# Altium PCB superhet1.PcbDoc (part 1 of 5)
Units mm, origin at the board's own origin, x right, y up, seen from the top; angles counter-clockwise.
Board outline 77 x 100 mm, 4 copper layers (Top Layer, Internal Plane 1, Signal Layer 1, Bottom Layer), stack 0.778 mm thick; 440 components, 348 nets, 1672 pads, 2403 vias.
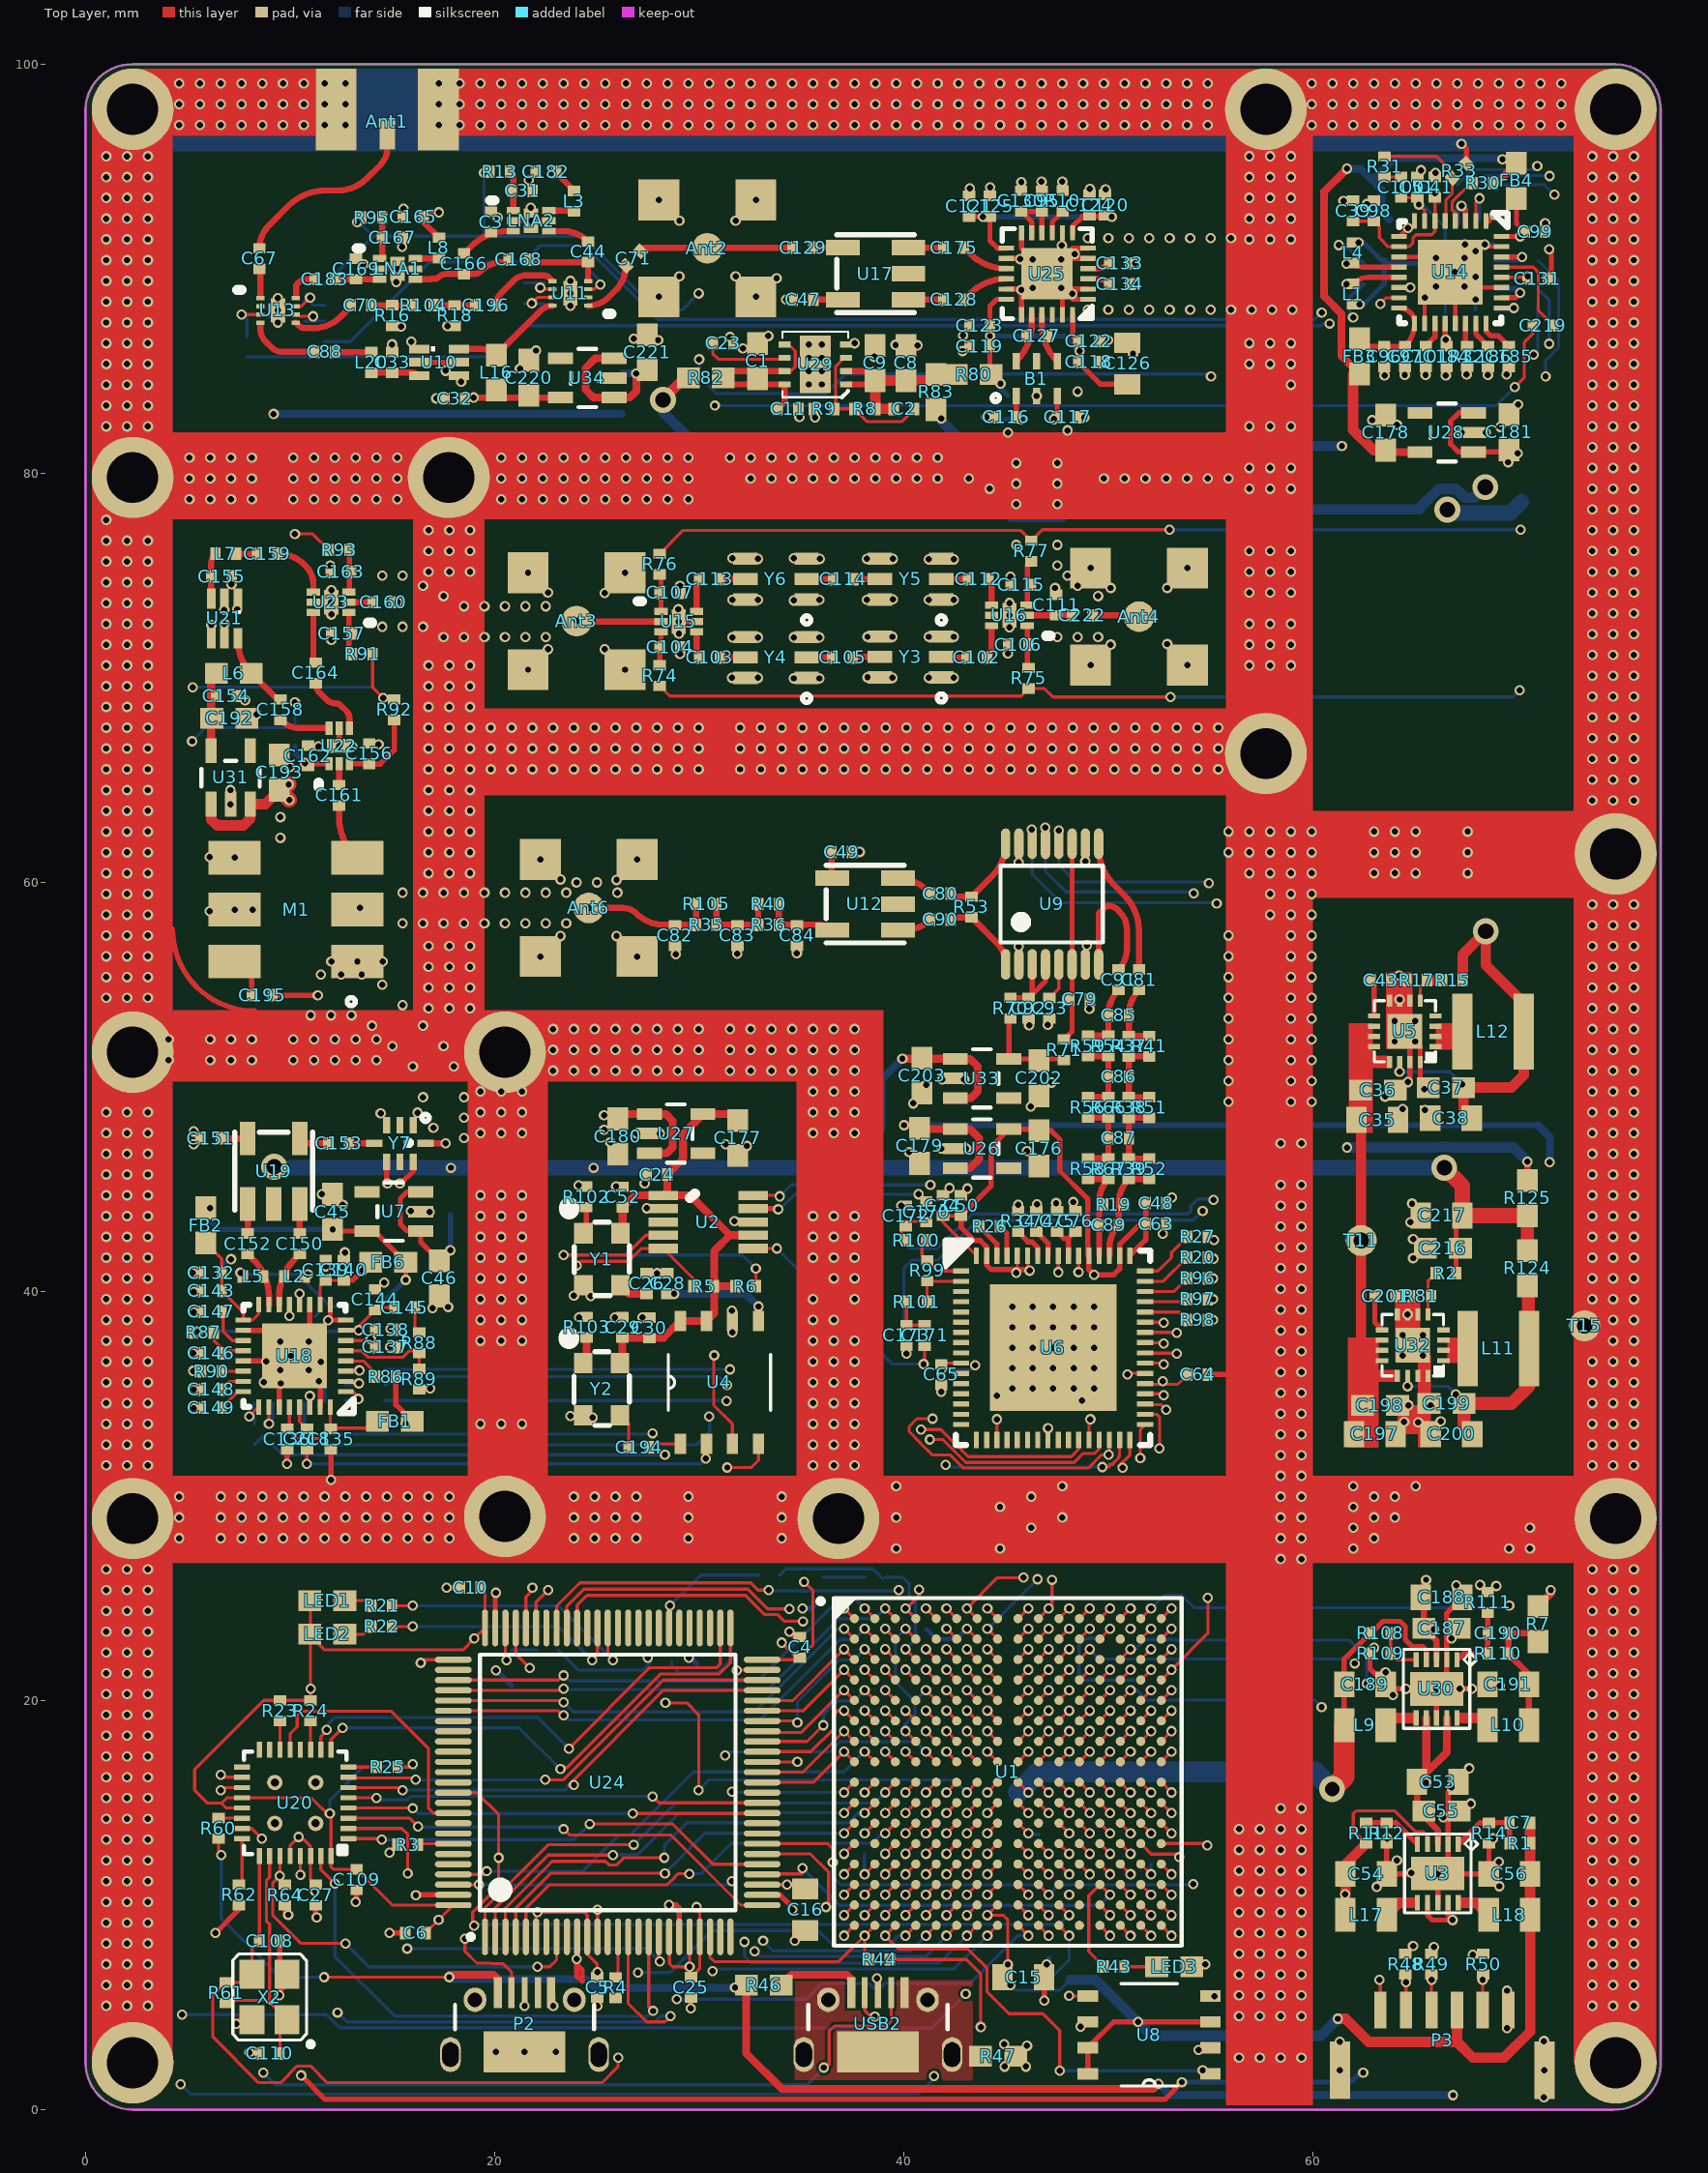
[diagram p0: Top Layer view]
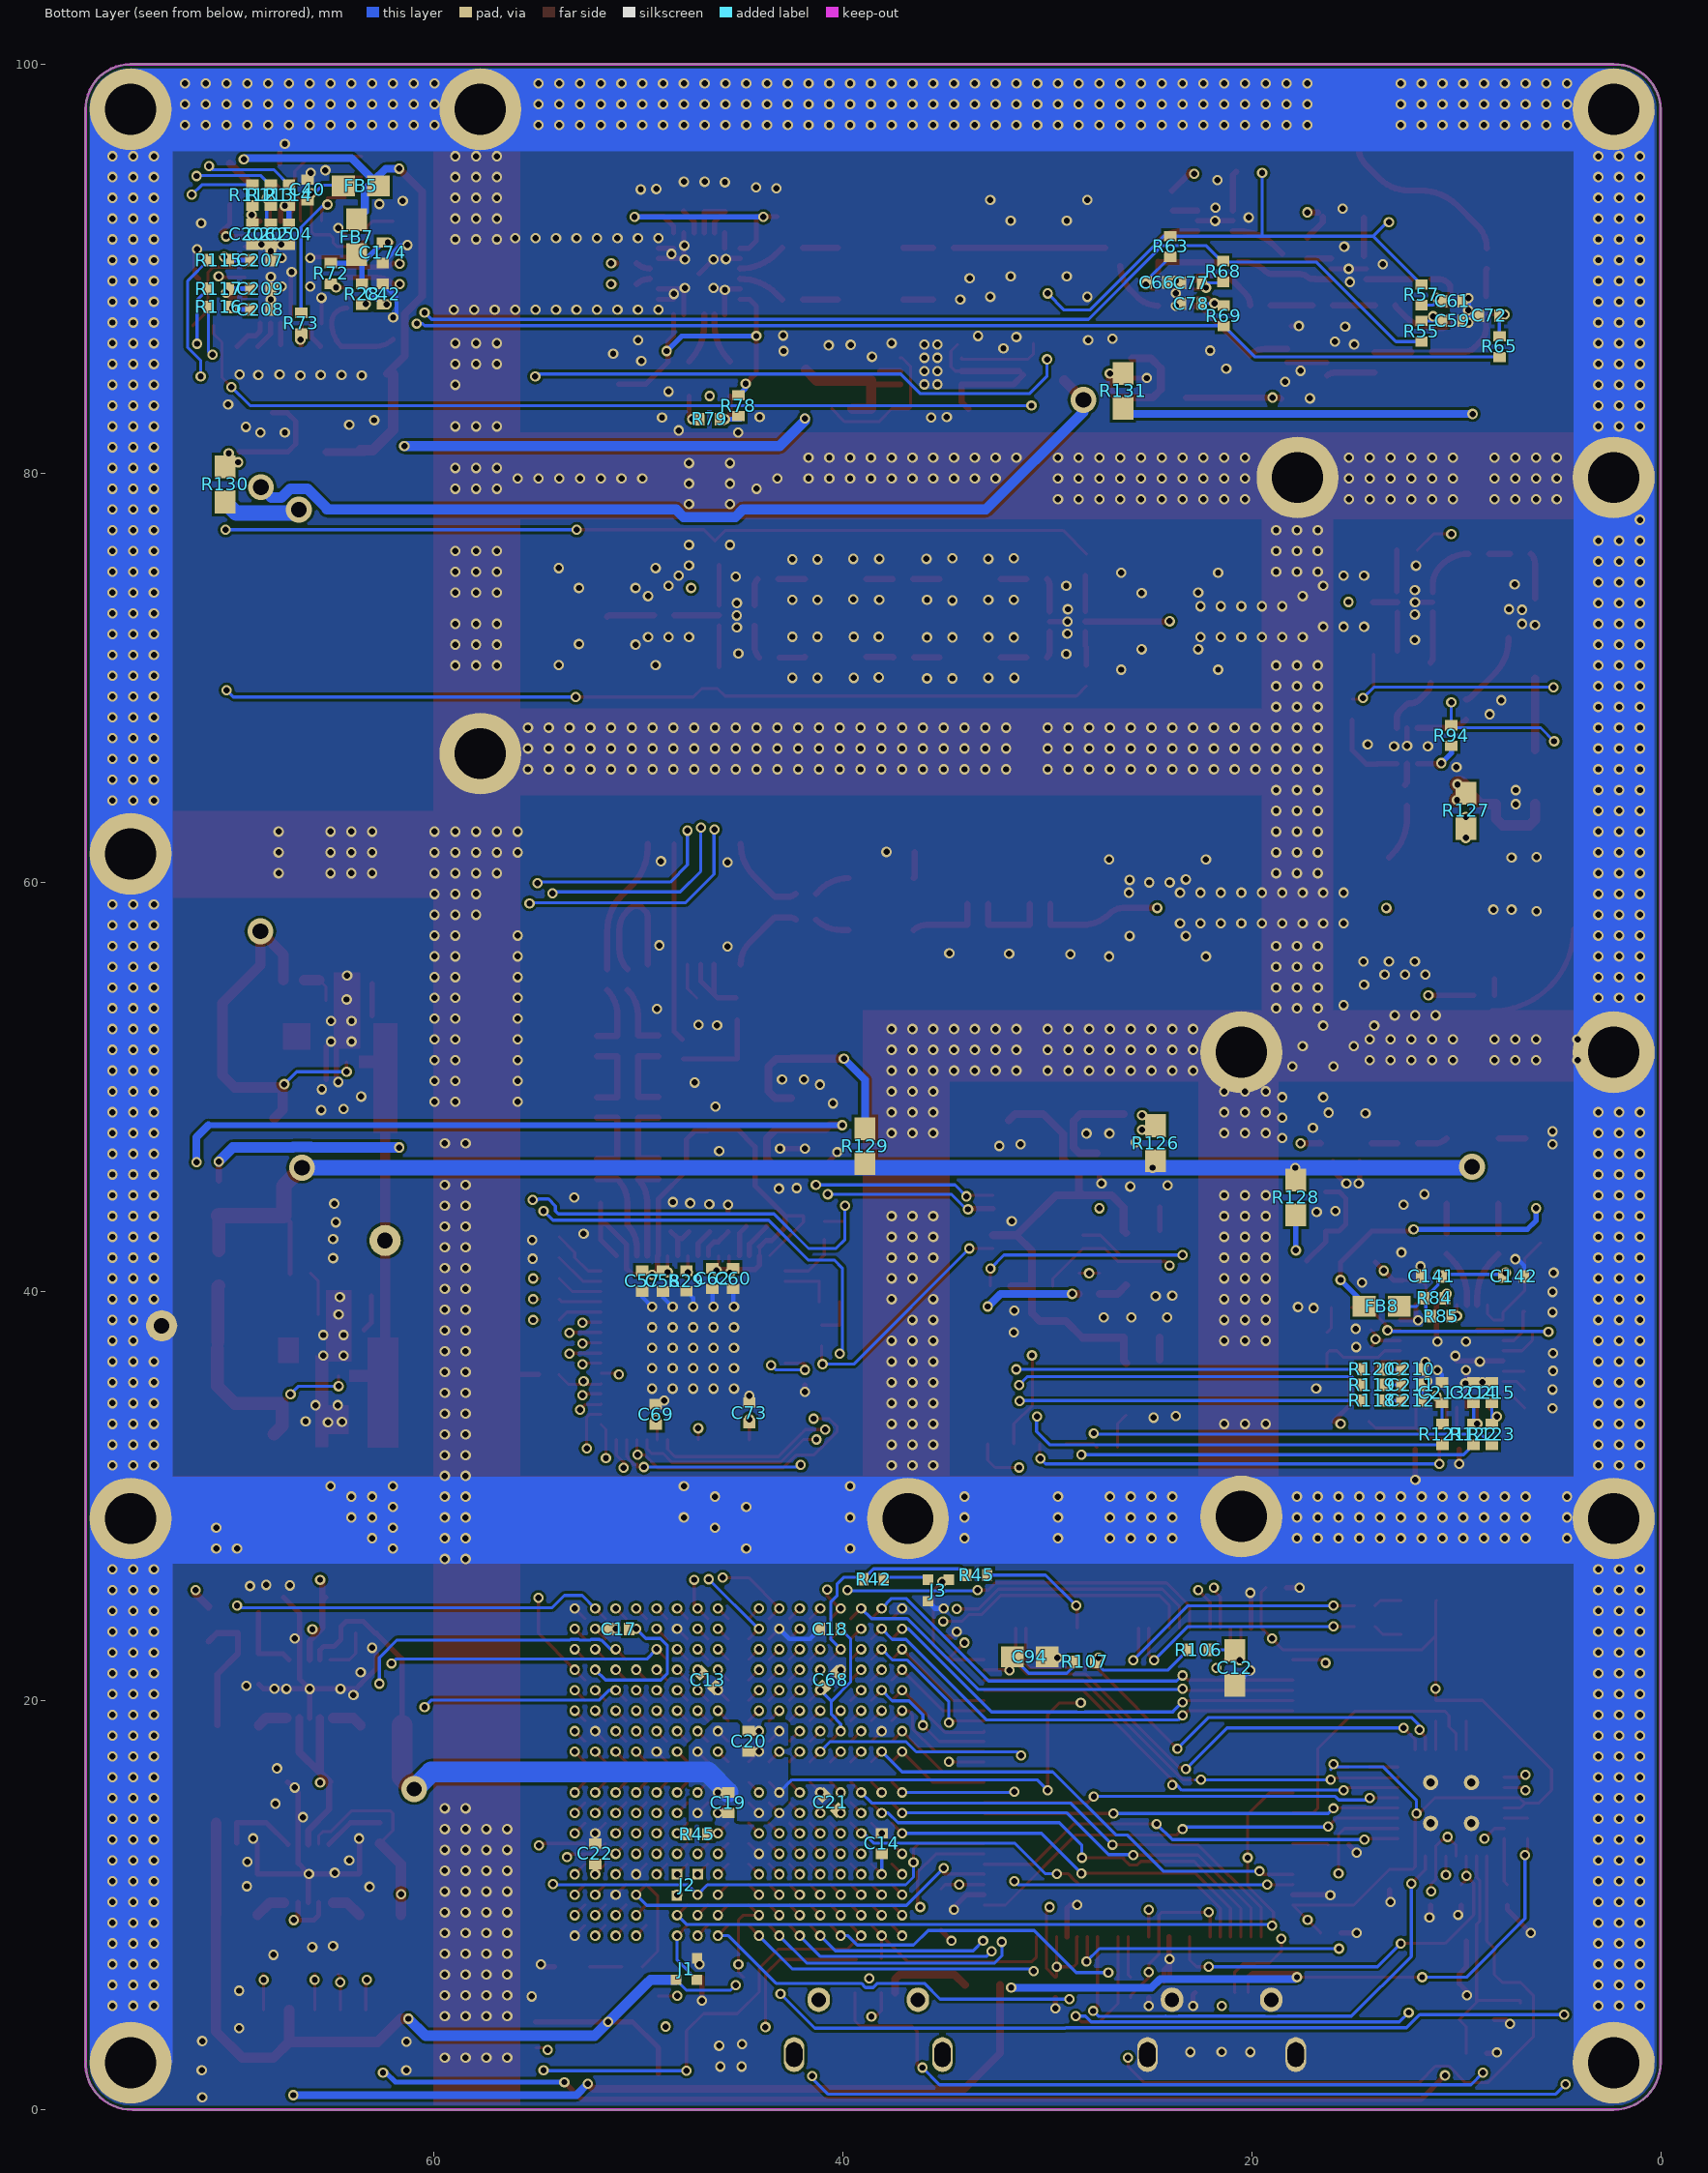
[diagram p1: Bottom Layer view, seen from below]
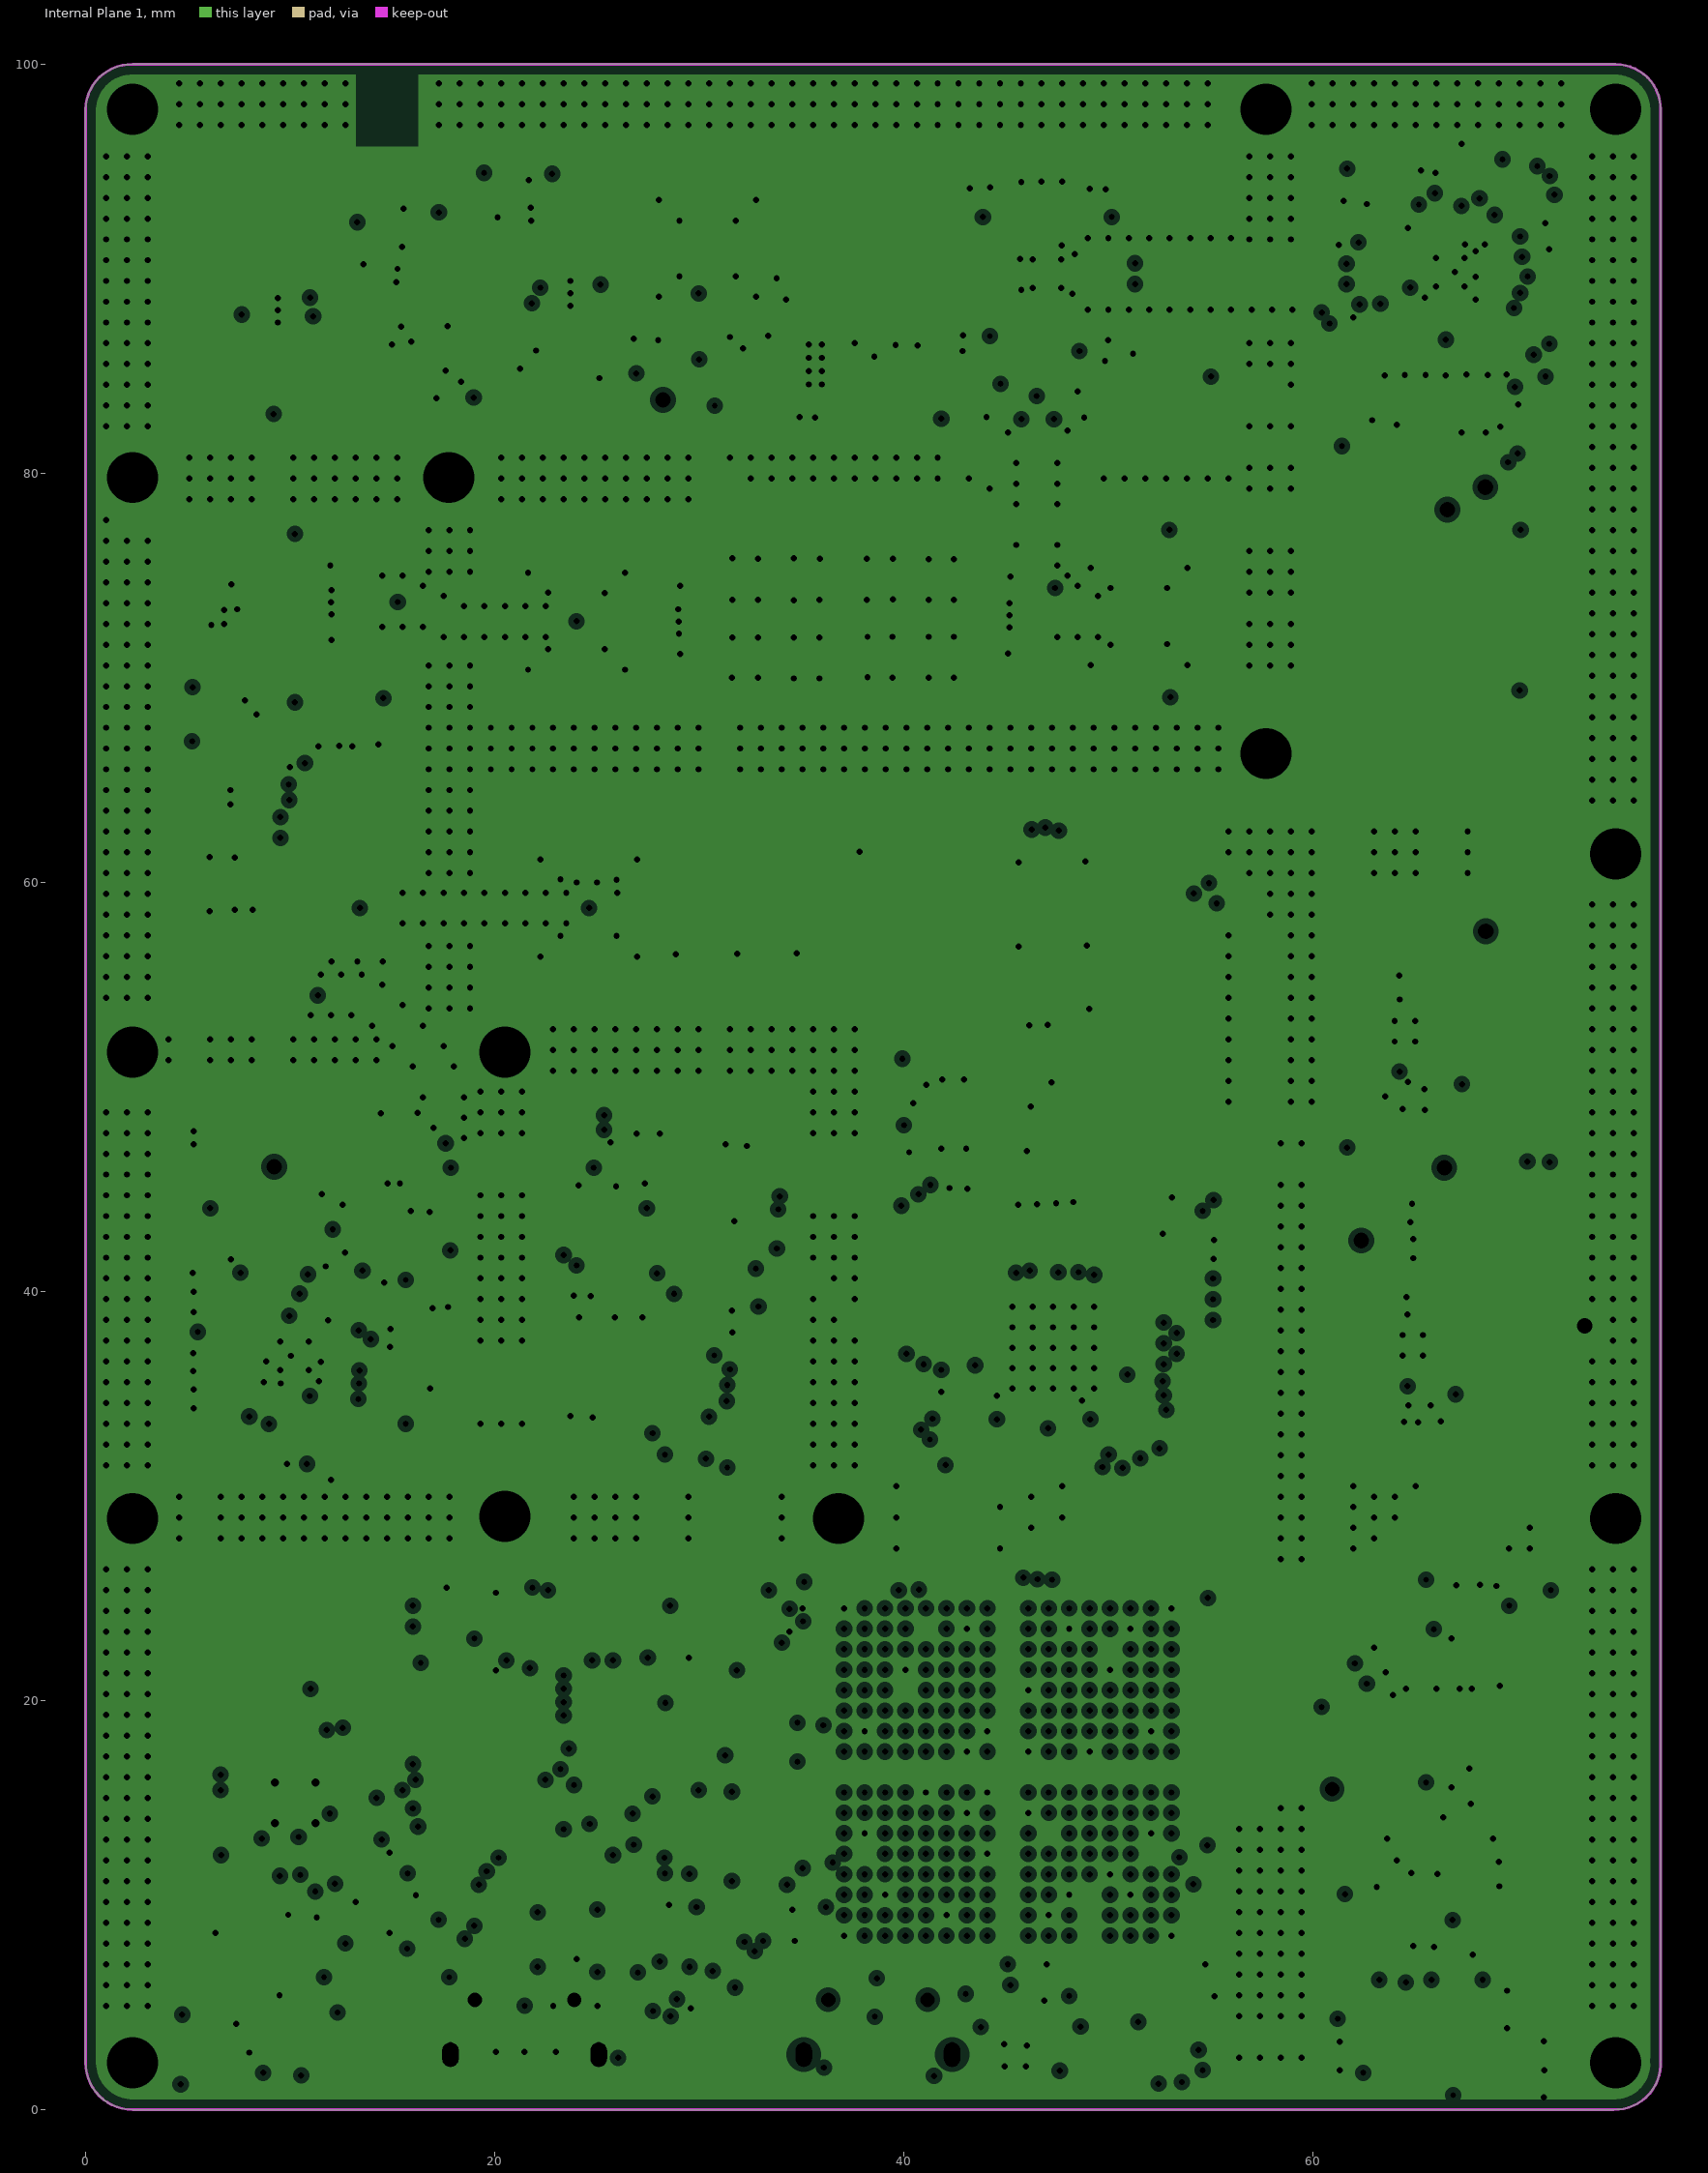
[diagram p2: Internal Plane 1, clearances drawn from the general rule]
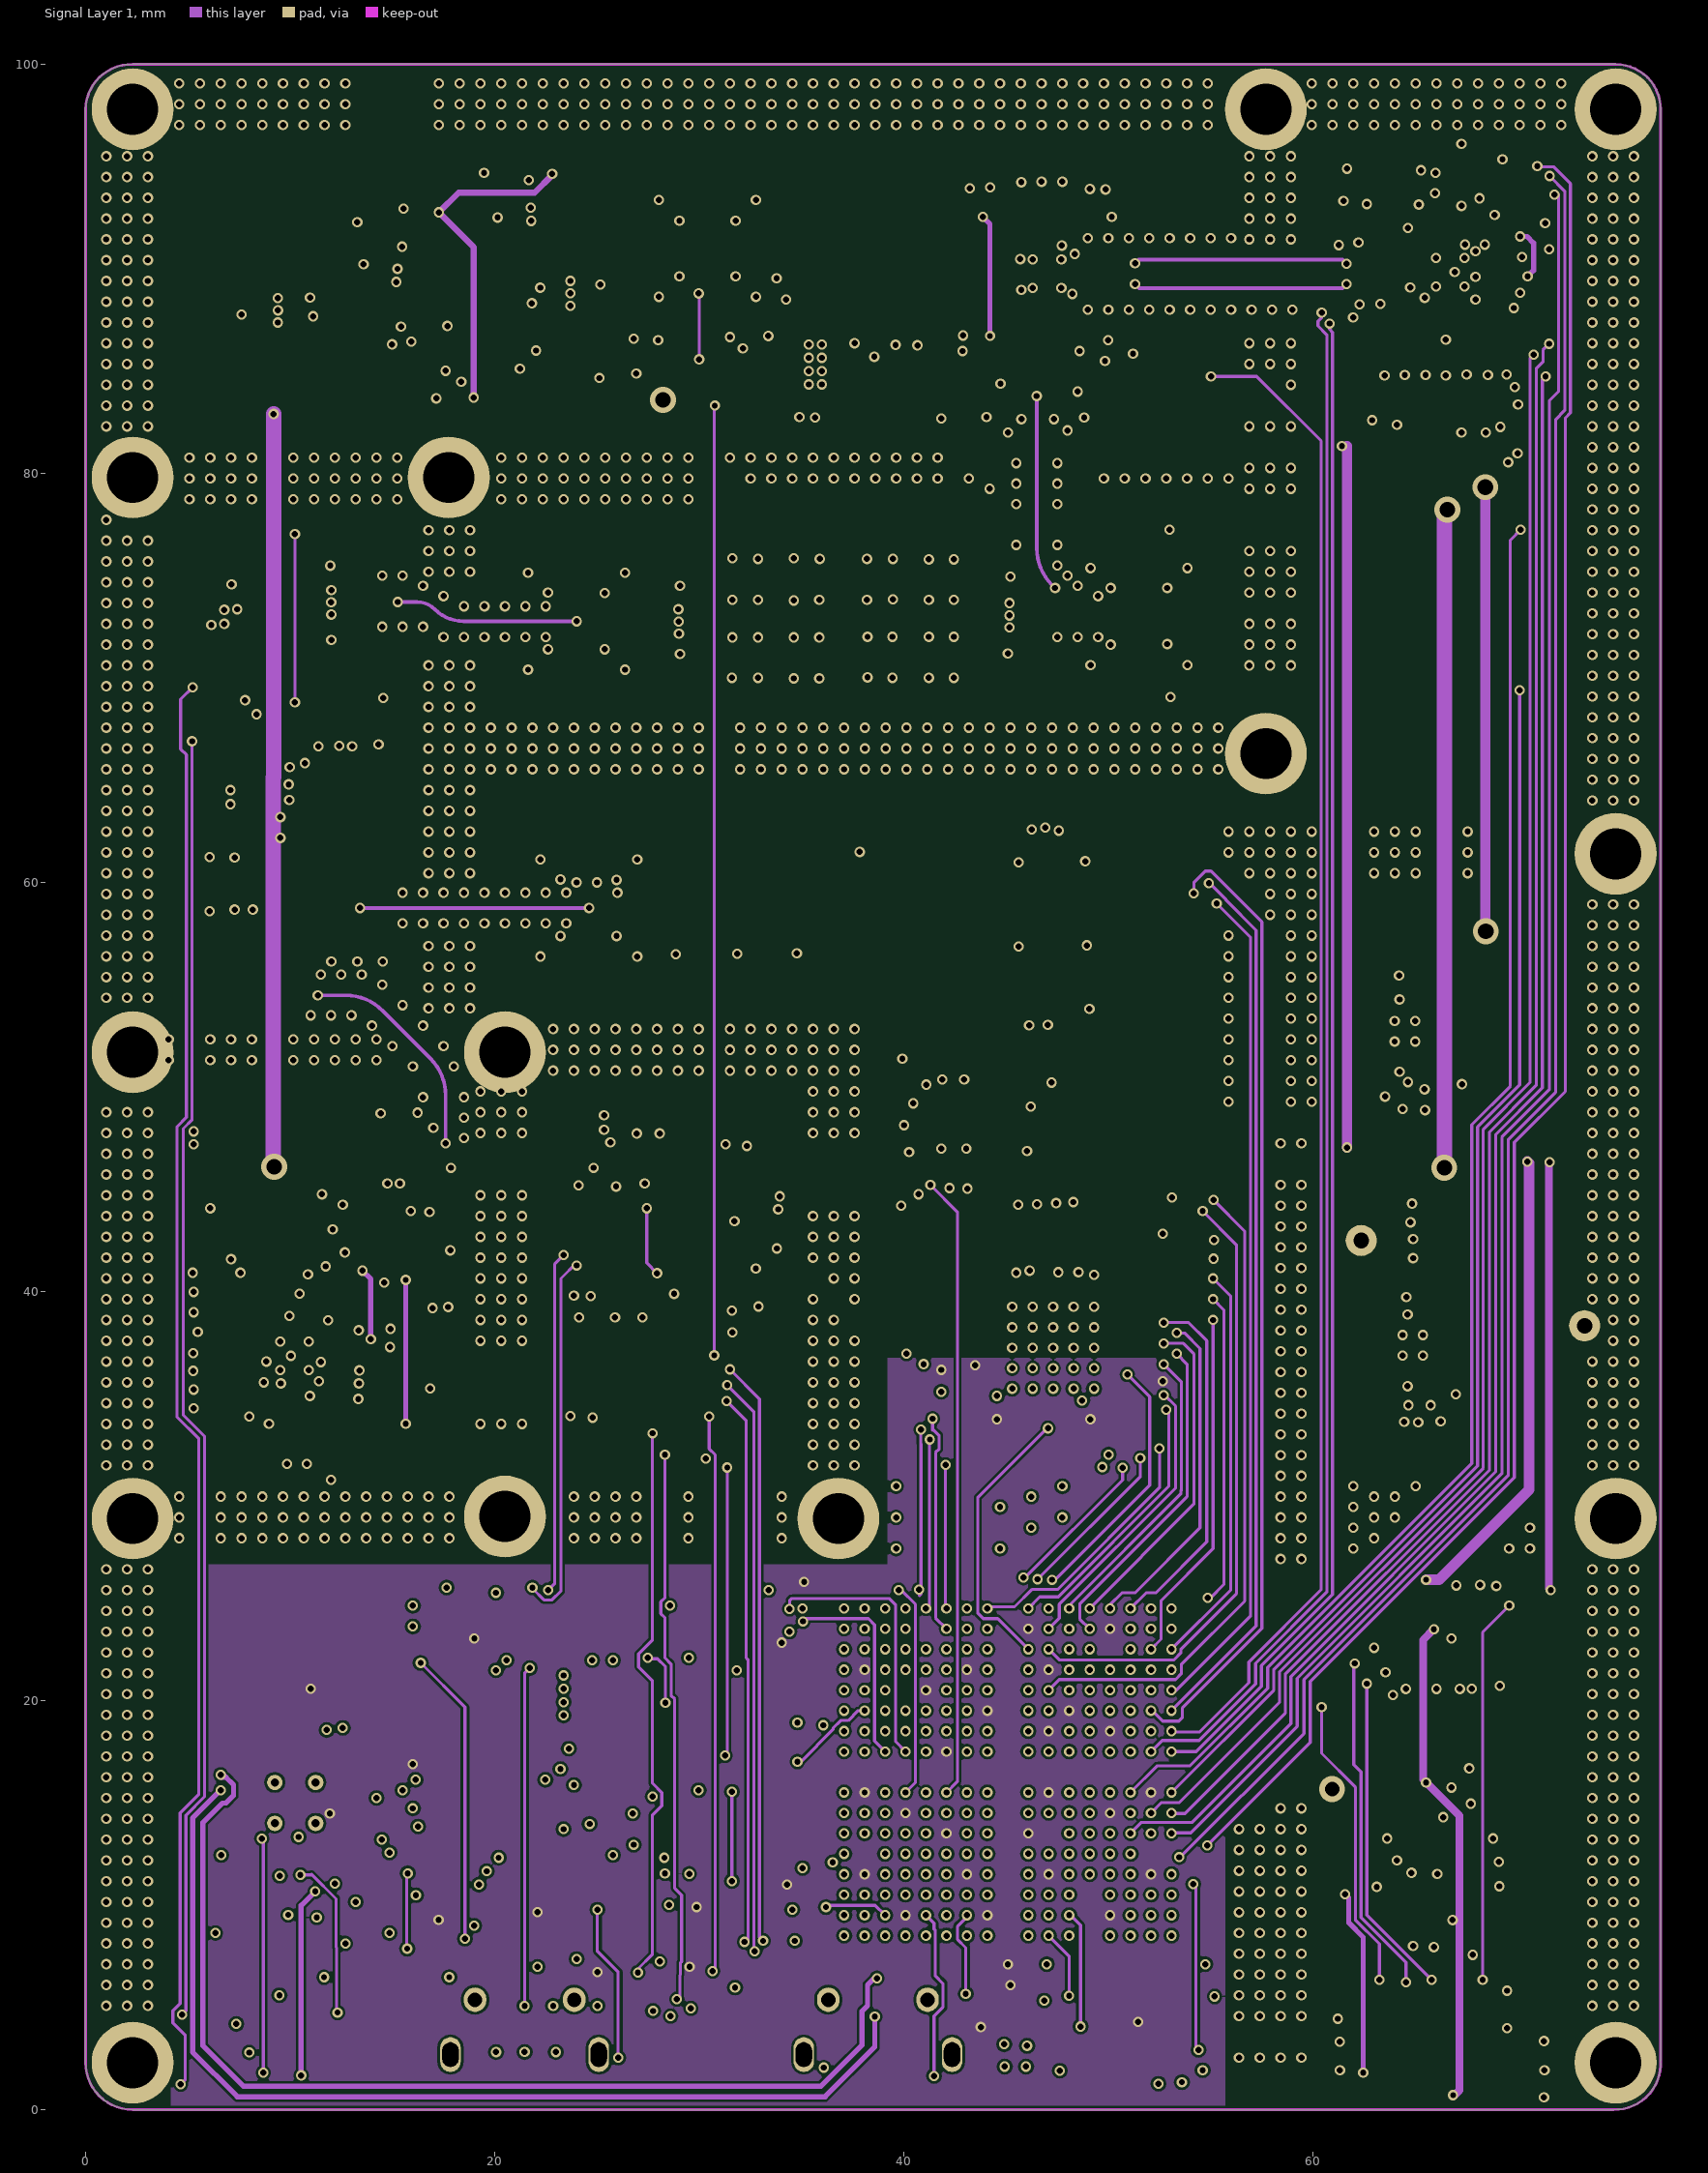
[diagram p3: Signal Layer 1]

## Layer stack, top to bottom
Top Solder: solder mask 0.0102, Solder Resist, Dk 3.8
Top Layer: signal copper 0.0356
Dielectric 1: core 0.254, Dk 4.2
Internal Plane 1: plane copper 0.036, net GND
Dielectric 3: core 0.254, Dk 4.2
Signal Layer 1: signal copper 0.036
Dielectric 4: prepreg 0.127, Dk 4.2
Bottom Layer: signal copper 0.0356
Bottom Solder: solder mask 0.0102, Solder Resist, Dk 3.8

## Board outline
0,2.3 0,97.8 cw(c2.25,97.75) 2.3,100 74.8,100 cw(c74.8,97.8) 77,97.8 77,2.4 76.996,2.4 cw(c74.75,2.25) 74.7,0 2.3,0 cw(c2.3,2.3)

## Design rules (kind name [scope] priority, off if disabled: settings)
Clearance [All] p1: gap=0.127 ignorepadtopadclearanceinfootprint=FALSE except(0: Arc-Hole Track-Hole SMDPad-Hole THPad-Hole Via-Hole Fill-Hole Poly-Hole Region-Hole Text-Hole)
DiffPairsRouting [All] p1: maxlimit=0.254 minlimit=0.254 mostfreqgap=0.254 toplayer_minwidth=0.152 toplayer_maxwidth=0.381 toplayer_prefwidth=0.381 midlayer1_minwidth=0.152 midlayer1_maxwidth=0.381 midlayer1_prefwidth=0.381 bottomlayer_minwidth=0.152 bottomlayer_maxwidth=0.381 bottomlayer_prefwidth=0.381 maxuncoupledlength=12.7
MinimumSolderMaskSliver [All] p1 off: minsoldermaskwidth=0.254
PlaneClearance [All] p1: clearance=0.254
PlaneConnect [All] p1: planeconnectstyle=Direct reliefexpansion=0.508 reliefentries=4 reliefconductorwidth=0.254 reliefairgap=0.254
PolygonConnect [All] p1: connectstyle=Direct reliefconductorwidth=0.254 reliefentries=4 polygonreliefangle="90 Angle" airgapwidth=0.254
RoomDefinition USB_HS_PHY [InComponentClass('USB_HS_PHY')] p1 off: confinementstyle=ConfineIn formatcopy=TRUE lockcomponents=FALSE outline 51.111,101.31 152.711,101.31 152.711,110.708 51.111,110.708
RoomDefinition power [InComponentClass('power')] p2 off: confinementstyle=ConfineIn formatcopy=TRUE lockcomponents=FALSE outline 51.365,90.642 319.843,90.642 319.843,100.294 51.365,100.294
RoomDefinition mix2_LO2 [InComponentClass('mix2_LO2')] p3 off: confinementstyle=ConfineIn formatcopy=TRUE lockcomponents=FALSE outline 51.111,77.434 413.315,77.434 413.315,89.626 51.111,89.626
RoomDefinition mix1_LO1 [InComponentClass('mix1_LO1')] p4 off: confinementstyle=ConfineIn formatcopy=TRUE lockcomponents=FALSE outline 51.111,66.258 584.765,66.258 584.765,76.418 51.111,76.418
RoomDefinition mcu [InComponentClass('mcu')] p5 off: confinementstyle=ConfineIn formatcopy=TRUE lockcomponents=FALSE outline 51.365,44.414 162.871,44.414 162.871,64.988 51.365,64.988
RoomDefinition LF_ADC [InComponentClass('LF_ADC')] p6 off: confinementstyle=ConfineIn formatcopy=TRUE lockcomponents=FALSE outline 51.111,29.936 461.575,29.936 461.575,43.398 51.111,43.398
RoomDefinition front_end [InComponentClass('front_end')] p7 off: confinementstyle=ConfineIn formatcopy=TRUE lockcomponents=FALSE outline 51.111,18.252 314.763,18.252 314.763,28.666 51.111,28.666
RoomDefinition FPGA [InComponentClass('FPGA')] p8 off: confinementstyle=ConfineIn formatcopy=TRUE lockcomponents=FALSE outline 51.111,2.758 194.367,2.758 194.367,17.236 51.111,17.236
RoomDefinition clock [InComponentClass('clock')] p9 off: confinementstyle=ConfineIn formatcopy=TRUE lockcomponents=FALSE outline 51.111,-7.402 133.661,-7.402 133.661,1.742 51.111,1.742
RoutingVias [All] p1: holewidth=0.305 width=0.508 viastyle="Through Hole" minholewidth=0.3 minwidth=0.5 maxholewidth=0.711 maxwidth=1.27
ShortCircuit ShortCircuit_1 [not InAnyNet vs not InAnyNet] p1: allowed=TRUE
ShortCircuit [All] p2: allowed=FALSE
SilkToBoardRegionClearance [All] p1 off:
SilkToSilkClearance [All] p1 off: silktosilkclearance=0.254
SilkToSolderMaskClearance [IsPad] p1 off: minsilkscreentomaskgap=0.254 clearancetoexposedcopper=TRUE
SolderMaskExpansion [All] p1: expansion=0.102
Width [All] p1: maxlimit=1.524 minlimit=0.152 preferedwidth=0.152
22 further rules are at their usual default settings.

## Classes and differential pairs
net class 50R: IF1_P LO1_N LO1_P LO2_N LO2_P NetAnt1_1 NetAnt2_1 NetAnt3_1 NetAnt6_1 NetB1_2 NetB1_6 NetC44_1 NetC47_2 NetC67_1 NetC70_1 NetC70_2 NetC71_2 NetC88_1 NetC88_2 NetC102_1 NetC102_2 NetC103_1 NetC103_2 NetC105_1 NetC105_2 NetC111_1 NetC112_1 NetC112_2 NetC113_1 NetC113_2 NetC114_1 NetC114_2 NetC128_2 NetC129_1 NetC133_2 NetC134_2 NetC151_1 NetC153_1 NetC153_2 NetC158_1 NetC158_2 NetC159_1 NetC160_1 NetC161_1 NetC161_2 NetC164_1 NetC164_2 NetC166_2 NetC169_2 NetC175_2 NetC183_1 NetC195_1 NetC195_2 NetC196_1 NetC196_2 NetL16_2
net class MCU-FPGA: CCLK DATA DONE FPGA_CLK FPGA_CLK2 FPGA_IO0 FPGA_IO1 FPGA_IO2 FPGA_IO3 FPGA_IO4 FPGA_IO5 FPGA_IO6 FPGA_IO7 FPGA_IO8 FPGA_IO9 FPGA_IO10 FPGA_IO11 FPGA_IO12 FPGA_IO13 FPGA_IO14 FPGA_IO15 FPGA_MCLK HSWAPEN INIT_B PROGRAM
net class FPGA_IO[15..0]: FPGA_IO0 FPGA_IO1 FPGA_IO2 FPGA_IO3 FPGA_IO4 FPGA_IO5 FPGA_IO6 FPGA_IO7 FPGA_IO8 FPGA_IO9 FPGA_IO10 FPGA_IO11 FPGA_IO12 FPGA_IO13 FPGA_IO14 FPGA_IO15
net class "ADC Signals": ADC_CLK_FPGA_N ADC_CLK_FPGA_P ADC_DATA_A0 ADC_DATA_A0..13 ADC_DATA_A1 ADC_DATA_A2 ADC_DATA_A3 ADC_DATA_A4 ADC_DATA_A5 ADC_DATA_A6 ADC_DATA_A7 ADC_DATA_A8 ADC_DATA_A9 ADC_DATA_A10 ADC_DATA_A11 ADC_DATA_A12 ADC_DATA_A13 CS-ADC CS-LF MOSI-LF NetC170_1 NetC171_1 NetU1_A14 NetU1_C9 NetU6_3 SCLK-ADC SCLK-LF SDATA-ADC
net class USB_HS_D[9..0]: USB_HS_D0 USB_HS_D1 USB_HS_D2 USB_HS_D3 USB_HS_D4 USB_HS_D5 USB_HS_D6 USB_HS_D7 USB_HS_D8 USB_HS_D9
component class USB_HS_PHY: C27 C108 C109 C110 R23 R24 R25 R46 R47 R60 R61 R62 R64 U20 USB2 X2
component class mix2_LO2: Ant6 C132 C135 C136 C137 C138 C139 C140 C141 C142 C143 C144 C145 C146 C147 C148 C149 C150 C151 C152 C153 C154 C155 C156 C157 C158 C159 C160 C161 C162 C163 C164 C195 C210 C211 C212 C213 C214 C215 C218 FB1 FB2 FB6 FB8 L2 L5 L6 L7 M1 R84 R85 R86 R87 R88 R89 R90 R91 R92 R93 R94 R118 R119 R120 R121 R122 R123 U18 U19 U21 U22 U23 Y7
component class mix1_LO1: Ant3 Ant4 B1 C39 C40 C41 C42 C47 C51 C95 C96 C97 C98 C99 C100 C101 C102 C103 C104 C105 C106 C107 C111 C112 C113 C114 C115 C116 C117 C118 C119 C120 C121 C122 C123 C124 C125 C126 C127 C128 C129 C130 C131 C133 C134 C174 C175 C184 C185 C186 C204 C205 C206 C207 C208 C209 C219 C222 FB3 FB4 FB5 FB7 L1 L4 R10 R28 R30 R31 R32 R33 R72 R73 R74 R75 R76 R77 R78 R79 R80 R112 R113 R114 R115 R116 R117 U14 U15 U16 U17 U25 Y3 Y4 Y5 Y6
component class mcu: C4 C5 C6 C10 C12 C25 C94 LED1 LED2 P2 R3 R4 R21 R22 R106 R107 U24
component class LF_ADC: C34 C48 C49 C50 C57 C58 C60 C62 C63 C64 C65 C69 C73 C74 C75 C76 C79 C80 C81 C82 C83 C84 C85 C86 C87 C89 C90 C91 C92 C93 C170 C171 C172 C173 R19 R20 R26 R27 R29 R34 R35 R36 R37 R38 R39 R40 R41 R51 R52 R53 R54 R56 R58 R59 R66 R67 R70 R71 R96 R97 R98 R99 R100 R101 R105 U6 U9 U12
component class front_end: Ant1 Ant2 C3 C31 C32 C33 C44 C59 C61 C66 C67 C70 C71 C72 C77 C78 C88 C165 C166 C167 C168 C169 C182 C183 C196 L3 L8 L16 L20 LNA1 LNA2 R13 R16 R18 R55 R57 R63 R65 R68 R69 R95 R104 U10 U11 U13
component class FPGA: C13 C14 C15 C16 C17 C18 C19 C20 C21 C22 C68 J1 J2 J3 LED3 P3 R42 R43 R44 R45 R48 R49 R50 U1 U8
component class clock: C24 C26 C28 C29 C30 C52 C194 R5 R6 R102 R103 U2 U4 Y1 Y2
component class power: C1 C2 C7 C8 C9 C11 C23 C35 C36 C37 C38 C43 C45 C46 C53 C54 C55 C56 C176 C177 C178 C179 C180 C181 C187 C188 C189 C190 C191 C192 C193 C197 C198 C199 C200 C201 C202 C203 C216 C217 C220 C221 L9 L10 L11 L12 L17 L18 R1 R2 R7 R8 R9 R11 R12 R14 R15 R17 R81 R82 R83 R108 R109 R110 R111 R124 R125 R126 R127 R128 R129 R130 R131 T11 T15 U3 U5 U7 U26 U27 U28 U29 U30 U31 U32 U33 U34
net class ADC_DATA_A[13..0]: ADC_DATA_A0 ADC_DATA_A1 ADC_DATA_A2 ADC_DATA_A3 ADC_DATA_A4 ADC_DATA_A5 ADC_DATA_A6 ADC_DATA_A7 ADC_DATA_A8 ADC_DATA_A9 ADC_DATA_A10 ADC_DATA_A11 ADC_DATA_A12 ADC_DATA_A13
net class USB-HS: USB_HS_CK USB_HS_D0 USB_HS_D1 USB_HS_D2 USB_HS_D3 USB_HS_D4 USB_HS_D5 USB_HS_D6 USB_HS_D7 USB_HS_D8 USB_HS_D9 USB_HS_DIR USB_HS_NXT USB_HS_RESET USB_HS_STP
differential pair USB_HS: +USB_HS_P -USB_HS_N
differential pair LO2: +LO2_P -LO2_N
differential pair LO1: +LO1_P -LO1_N
differential pair ADC_CLK_FPGA: +ADC_CLK_FPGA_P -ADC_CLK_FPGA_N

## Components (designator, comment, footprint, x,y, rotation, side; value= is the part's Value field where it differs from the comment)
Ant1 "Antenna" SMA-2 17.247,97.79 r180 top
Ant2 "Antenna" SMA-SMT 30.4,91 r0 top
Ant3 "Antenna" SMA-SMT 24.003,72.771 r90 top
Ant4 "Antenna" SMA-SMT 51.5,73 r0 top
Ant6 "Antenna" SMA-SMT 24.599,58.75 r270 top
B1 "0900BL18B200" 0900BL18B200 46.497,84.681 r0 top
C1 "2.2uF" 0603 32.842,85.496 r270 top
C2 "470nF" 0402 40.005,83.15 r0 top
C3 "Cap" 0402 19.822,92.286 r270 top
C4 "0.1uF * 5" 0402 34.925,22.606 r270 top
C5 "1n" 0402 25.019,5.969 r90 top
C6 "1n" 0402 16.129,8.636 r0 top
C7 "33pF" 0402 70.106,14.025 r0 top
C8 "0.1uF" 0603 40.1,85.4 r270 top
C9 "2.2uF" 0603 38.6,85.4 r270 top
C10 "1n" 0402 18.796,25.527 r0 top
C11 "0.1uF" 0402 34.35,83.15 r180 top
C12 "2.2uF" 0603 20.828,21.59 r90 bottom
C13 "0.1uF" 0402 46.585,21.01 r225 bottom
C14 "0.1uF" 0402 38.075,13.005 r90 bottom
C15 "Cap" 0805 45.847,6.477 r180 top
C16 "Cap" 0805 35.179,9.779 r90 top
C17 "0.1uF" 0402 50.927,23.495 r0 bottom
C18 "0.1uF" 0402 40.589,23.495 r0 bottom
C19 "0.1uF" 0402 45.585,15.01 r270 bottom
C20 "0.1uF" 0402 44.585,18.01 r90 bottom
C21 "0.1uF" 0402 40.585,15.01 r45 bottom
C22 "0.1uF" 0402 52.085,12.51 r90 bottom
C23 "470nF" 0402 31.166,86.36 r180 top
C24 "0.1uF" 0402 27.94,45.72 r180 top
C25 "1n" 0402 29.591,5.969 r90 top
C26 "0.1uF" 0402 27.432,40.386 r90 top
C27 "1uF" 0402 11.25,10.5 r270 top
C28 "0.1uF" 0402 28.448,40.386 r90 top
C29 "0.1uF" 0402 26.25,38.25 r270 top
C30 "0.1uF" 0402 27.559,38.227 r270 top
C31 "Cap" 0402 21.346,93.81 r0 top
C32 "Cap" 0402 18.044,83.65 r0 top
C33 "Cap" 0402 14.996,85.428 r270 top
C34 "0.1uF" 0402 41.91,44.196 r90 top
C35 "Cap" 0805 63.144,48.387 r0 top
C36 "Cap" 0603 63.17,49.835 r0 top
C37 "Cap" 0603 66.496,49.973 r0 top
C38 "Cap" 0805 66.746,48.473 r0 top
C39 "0.1uF" 0402 61.962,92.825 r90 top
C40 "0.1uF" 0402 66.153,93.849 r90 bottom
C41 "0.1uF" 0402 65.964,93.98 r90 top
C42 "0.1uF" 0402 62.47,88.761 r90 bottom
C43 "3.3nF" 0402 63.326,55.223 r0 top
C44 "10pF" 0402 24.564,90.832 r90 top
C45 "4.7uF" 0603 12.081,43.903 r270 top
C46 "4.7uF" 0603 17.297,40.64 r90 top
C47 "1nF" 0402 35.067,88.491 r0 top
C48 "0.1uF" 0402 52.324,44.323 r0 top
C49 "0.1uF" 0402 36.966,61.482 r0 top
C50 "0.1uF" 0402 42.799,44.196 r90 top
C51 "12nF" 0402 65.1,93.98 r90 top
C52 "0.1uF" 0402 26.254,44.624 r270 top
C53 "10UF" 0805 66.106,16.025 r180 top
C54 "4.7UF" 0805 62.606,11.525 r180 top
C55 "33pF" 0603 66.294,14.605 r180 top
C56 "4.7UF" 0805 69.606,11.525 r0 top
C57 "0.1uF" 0402 49.784,40.513 r270 bottom
C58 "0.1uF" 0402 48.768,40.513 r270 bottom
C59 "47pF" 0402 10.17,87.46 r0 bottom
C60 "0.1uF" 0402 45.339,40.64 r270 bottom
C61 "47pF" 0402 10.185,88.417 r0 bottom
C62 "0.1uF" 0402 46.355,40.64 r270 bottom
C63 "0.1uF" 0402 52.324,43.307 r0 top
C64 "0.1uF" 0402 54.356,35.941 r0 top
C65 "0.1uF" 0402 41.834,35.941 r270 top
C66 "47pF" 0402 24.613,89.332 r0 bottom
C67 "47pF" 0402 8.5,90.5 r90 top
C68 "0.1uF" 0402 40.585,21.01 r315 bottom
C69 "0.1uF" 0402 49.124,33.985 r90 bottom
C70 "22pF" 0402 13.472,88.222 r180 top
C71 "47pF" 0402 26.772,90.5 r225 top
C72 "47pF" 0402 8.392,87.714 r180 bottom
C73 "0.1uF" 0402 44.552,34.061 r90 bottom
C74 "0.1uF" 0402 46.482,43.434 r90 top
C75 "0.1uF" 0402 47.498,43.434 r90 top
C76 "0.1uF" 0402 48.387,43.434 r90 top
C77 "47pF" 0402 22.938,89.308 r180 bottom
C78 "47pF" 0402 22.938,88.292 r180 bottom
C79 "0.1uF" 0402 48.59,54.28 r0 top
C80 "0.1uF" 0402 41.783,59.45 r0 top
C81 "0.1uF" 0402 51.5,55.25 r270 top
C82 "TBD" 0402 28.813,57.399 r90 top
C83 "TBD" 0402 31.861,57.399 r90 top
C84 "TBD" 0402 34.782,57.399 r90 top
C85 "TBD" 0402 50.5,53.5 r0 top
C86 "TBD" 0402 50.5,50.5 r0 top
C87 "TBD" 0402 50.5,47.5 r0 top
C88 "1nF" 0402 11.694,85.936 r180 top
C89 "TBD" 0402 50,43.25 r0 top
C90 "0.1uF" 0402 41.783,58.18 r0 top
C91 "0.1uF" 0402 50.5,55.25 r270 top
C92 "0.1uF" 0402 46.101,53.848 r270 top
C93 "1nF" 0402 47.117,53.848 r270 top
C94 "2.2uF" 0603 30.836,22.149 r0 bottom
C95 "0.1uF" 0402 46.751,93.317 r270 top
C96 "0.1uF" 0402 63.486,85.713 r270 top
C97 "0.1uF" 0402 64.502,85.713 r270 top
C98 "0.1uF" 0402 62.978,92.825 r90 top
C99 "0.1uF" 0402 70.852,91.809 r0 top
C100 "0.1uF" 0402 64.313,93.98 r90 top
C101 "1uF" 0402 65.518,85.713 r270 top
C102 "100pF" 0402 43.561,70.993 r0 top
C103 "100pF" 0402 30.5,71 r0 top
C104 "47pF" 0402 28.575,71.501 r180 top
C105 "100pF" 0402 37,71 r0 top
C106 "47pF" 0402 45.593,71.628 r0 top
C107 "47pF" 0402 28.575,74.168 r180 top
C108 "10pF" 0402 9,8.25 r180 top
C109 "1uF" 0402 13.25,11.25 r270 top
C110 "10pF" 0402 9,2.75 r0 top
C111 "100pF" 0402 47.447,73.558 r90 top
C112 "100pF" 0402 43.639,74.831 r0 top
C113 "100pF" 0402 30.5,74.831 r0 top
C114 "100pF" 0402 37.035,74.831 r0 top
C115 "47pF" 0402 45.72,74.549 r0 top
C116 "47pF" 0402 45,82.75 r0 top
C117 "47pF" 0402 48,82.75 r180 top
C118 "0.1uF" 0402 49.037,85.443 r180 top
C119 "0.1uF" 0402 43.703,86.205 r0 top
C120 "0.1uF" 0402 49.835,93.116 r270 top
C121 "0.1uF" 0402 43.195,93.063 r270 top
C122 "10nF" 0402 49.037,86.459 r180 top
C123 "10nF" 0402 43.703,87.221 r0 top
C124 "10nF" 0402 49.073,93.116 r270 top
C125 "10nF" 0402 44.211,93.063 r270 top
C126 "10uF" 0805 50.927,85.369 r270 top
C127 "27nH" 0402 46.497,86.713 r0 top
C128 "1nF" 0402 42.433,88.491 r0 top
C129 "10nF" 0402 35.067,91.031 r180 top
C130 "100pF" 0402 45.735,93.317 r270 top
C131 "0.1uF" 0402 70.979,89.523 r0 top
C132 "0.1uF" 0402 6.151,40.919 r180 top
C133 "1nF" 0402 50.561,90.269 r180 top
C134 "1nF" 0402 50.561,89.253 r180 top
C135 "0.1uF" 0402 11.993,32.791 r270 top
C136 "0.1uF" 0402 9.855,32.791 r270 top
C137 "0.1uF" 0402 14.656,37.287 r0 top
C138 "0.1uF" 0402 14.656,38.125 r0 top
C139 "0.1uF" 0402 11.739,41.046 r90 top
C140 "0.1uF" 0402 12.624,41.046 r90 top
C141 "0.1uF" 0402 11.201,40.742 r0 bottom
C142 "0.1uF" 0402 7.188,40.742 r180 bottom
C143 "0.1uF" 0402 6.151,40.03 r180 top
C144 "12nF" 0402 14.148,39.599 r90 top
C145 "0.1uF" 0402 15.596,39.218 r0 top
C146 "820p" 0402 6.151,36.982 r180 top
C147 "1uF" 0402 6.151,39.014 r180 top
C148 "1uF" 0402 6.151,35.204 r180 top
C149 "1uF" 0402 6.151,34.315 r180 top
C150 "1nF" 0402 10.469,42.328 r90 top
C151 "1nF" 0402 6.119,47.492 r180 top
C152 "1nF" 0402 7.929,42.328 r90 top
C153 "1nF" 0402 12.369,47.242 r0 top
C154 "Cap" 0402 6.883,69.113 r180 top
C155 "Cap" 0402 6.655,74.955 r180 top
C156 "47pF" 0402 13.868,66.294 r270 top
C157 "47pF" 0402 12.515,72.174 r0 top
C158 "Cap" 0402 9.525,68.453 r270 top
C159 "Cap" 0402 8.89,76.073 r180 top
C160 "100pF" 0402 14.547,73.698 r0 top
C161 "100pF" 0402 12.395,64.262 r270 top
C162 "47pF" 0402 10.871,66.192 r270 top
C163 "47pF" 0402 12.471,75.184 r0 top
C164 "Cap" 0402 11.25,70.25 r270 top
C165 "Cap" 0402 16.012,92.54 r0 top
C166 "10pF" 0402 18.5,90.25 r270 top
C167 "Cap" 0402 14.996,91.524 r0 top
C168 "10pF" 0402 21.184,90.449 r180 top
C169 "Cap" 0402 13.218,90 r270 top
C170 "0.1uF" 0402 41.1,43.9 r270 top
C171 "0.1uF" 0402 41.021,37.846 r90 top
C172 "0.1uF" 0402 40.1,43.7 r270 top
C173 "0.1uF" 0402 40.132,37.846 r90 top
C174 "0.1uF" 0402 62.47,90.793 r270 bottom
C175 "1nF" 0402 42.433,91.031 r0 top
C176 "4.7uF" 0603 46.609,46.99 r90 top
C177 "4.7uF" 0603 31.877,47.498 r90 top
C178 "4.7uF" 0603 63.554,81.996 r270 top
C179 "4.7uF" 0603 40.767,47.117 r90 top
C180 "4.7uF" 0603 26.01,47.574 r90 top
C181 "4.7uF" 0603 69.596,82.017 r270 top
C182 "Cap" 0402 22.5,94.75 r0 top
C183 "10pF" 0402 11.694,89.492 r0 top
C184 "820p" 0402 66.534,85.713 r270 top
C185 "1uF" 0402 69.582,85.713 r270 top
C186 "1uF" 0402 68.566,85.713 r270 top
C187 "33pF" 0603 66.295,23.546 r180 top
C188 "10UF" 0805 66.295,25.046 r180 top
C189 "4.7UF" 0805 62.545,20.796 r180 top
C190 "33pF" 0402 69.045,23.296 r0 top
C191 "4.7UF" 0805 69.545,20.796 r0 top
C192 "4.7uF" 0603 7.036,68.021 r180 top
C193 "4.7uF" 0603 9.474,65.38 r270 top
C194 "0.1uF" 0402 27.051,32.385 r0 top
C195 "100pF" 0402 8.636,54.483 r180 top
C196 "22pF" 0402 19.568,88.222 r180 top
C197 "Cap" 0805 63.024,33.027 r0 top
C198 "Cap" 0603 63.271,34.442 r0 top
C199 "Cap" 0603 66.524,34.527 r0 top
C200 "Cap" 0805 66.774,33.027 r0 top
C201 "3.3nF" 0402 63.524,39.777 r0 top
C202 "4.7uF" 0603 46.609,50.419 r90 top
C203 "4.7uF" 0603 40.894,50.546 r90 top
C204 "100pF" 0402 67.056,91.694 r270 bottom
C205 "100pF" 0402 67.945,91.694 r270 bottom
C206 "100pF" 0402 68.834,91.694 r270 bottom
C207 "100pF" 0402 68.453,90.424 r180 bottom
C208 "100pF" 0402 68.453,88.011 r180 bottom
C209 "100pF" 0402 68.453,89.027 r180 bottom
C210 "100pF" 0402 12.192,36.195 r180 bottom
C211 "100pF" 0402 12.192,35.433 r180 bottom
C212 "100pF" 0402 12.192,34.671 r180 bottom
C213 "100pF" 0402 10.693,35.052 r90 bottom
C214 "100pF" 0402 9.144,35.052 r90 bottom
C215 "100pF" 0402 8.255,35.052 r90 bottom
C216 "Cap" 0603 66.345,42.113 r0 top
C217 "Cap" 0805 66.294,43.713 r0 top
C218 "0.1uF" 0402 10.82,32.791 r90 top
C219 "100nF" 0402 71.247,87.224 r0 top
C220 "4.7uF" 0603 21.666,84.684 r270 top
C221 "4.7uF" 0603 27.457,85.928 r270 top
C222 "100pF" 0402 48.717,73.05 r180 top
FB1 "FB" 0603 15.113,33.655 r0 top
FB2 "FB" 0603 5.869,43.242 r270 top
FB3 "FB" 0603 62.281,85.725 r270 top
FB4 "FB" 0603 69.952,94.31 r270 top
FB5 "FB" 0603 63.551,94.056 r180 bottom
FB6 "FB" 0603 14.787,41.427 r0 top
FB7 "FB" 0603 63.74,91.555 r270 bottom
FB8 "FB" 0603 13.644,39.268 r180 bottom
J1 "jumper" 0402J 47.117,6.35 r0 bottom
J2 "jumper" 0402J 48.085,11.51 r180 bottom
J3 "jumper" 0402J 35.814,25.908 r180 bottom
L1 "Inductor" 0402 61.962,88.761 r90 top
L2 "Inductor" 0402 10.211,40.742 r180 top
L3 "Inductor" 0402 23.886,93.302 r90 top
L4 "Inductor" 0402 61.962,90.793 r270 top
L5 "Inductor" 0402 8.179,40.742 r0 top
L6 "Inductor" 0603 7.239,70.231 r0 top
L7 "Inductor" 0402 6.858,76.073 r180 top
L8 "Inductor" 0402 17.282,91.016 r90 top
L9 "2.2UH" 0806 62.545,18.796 r180 top
L10 "2.2uH" 0806 69.545,18.796 r0 top
L11 "2.2uH" L4015 67.564,37.211 r0 top
L12 "2.2uH" L4015 67.31,52.705 r0 top
L16 "Inductor" 0603 20.076,84.92 r90 top
L17 "2.2UH" 0806 62.606,9.525 r180 top
L18 "2.2uH" 0806 69.606,9.525 r0 top
L20 "Inductor" 0402 13.98,85.428 r270 top
LED1 "LED0" 0603 11.811,24.892 r0 top
LED2 "LED0" 0603 11.811,23.241 r0 top
LED3 "LED0" 0603 53.213,6.985 r0 top
LNA1 "SKY65404" SKY65404-31 15.25,90 r0 top
LNA2 "SKY65404" SKY65404-31 21.78,92.343 r0 top
M1 "ADE-2" ADE-2 10.287,58.674 r180 top
P2 "SWD_MicroUSB" MICRO-YZX 21.463,-0.127 r0 top
P3 "JTAG-6P" GH1.25-6 66.421,3.429 r0 top
R1 "300k" 0402 70.106,13.025 r0 top
R2 "51k 1%" 0402 66.497,40.894 r180 top
R3 "10k" 0402 15.748,12.954 r0 top
R4 "10k" 0402 25.908,5.969 r270 top
R5 "4.7k" 0402 30.226,40.259 r180 top
R6 "4.7k" 0402 32.258,40.259 r0 top
R7 "FB" 0603 70.993,23.749 r270 top
R8 "6.25k" 0402 38.1,83.15 r180 top
R9 "10k" 0402 36.1,83.15 r180 top
R10 "Res2" 0402 47.767,93.317 r90 top
R11 "180k" 0402 62.606,13.525 r270 top
R12 "180k" 0402 63.606,13.525 r270 top
R13 "200R" 0402 20.25,94.75 r180 top
R14 "68k" 0402 68.606,13.525 r270 top
R15 "51k 1%" 0402 66.826,55.223 r180 top
R16 "TBD" 0402 14.996,87.714 r90 top
R17 "10k 1%" 0402 65.076,55.223 r180 top
R18 "TBD" 0402 18.044,87.714 r270 top
R19 "100/NC" 0402 50.25,44.25 r0 top
R20 "10k 1%" 0402 54.356,41.656 r180 top
R21 "10k" 0402 14.478,24.638 r180 top
R22 "10k" 0402 14.478,23.622 r180 top
R23 "10k" 0402 9.5,19.5 r90 top
R24 "10k" 0402 11,19.5 r90 top
R25 "10k" 0402 14.75,16.75 r0 top
R26 "1k" 0402 44.196,43.18 r0 top
R27 "10k 1%" 0402 54.356,42.672 r180 top
R28 "50" 0402 63.486,88.761 r270 bottom
R29 "0R" 0402 47.625,40.513 r90 bottom
R30 "10k" 0402 68.301,94.183 r0 top
R31 "30.1" 0402 63.5,94.996 r270 top
R32 "5.1k" 0402 67.55,85.713 r90 top
R33 "90.9" 0402 67.158,94.793 r225 top
R34 "10k 1%" 0402 45.593,43.434 r270 top
R35 "TBD" 0402 30.337,57.924 r0 top
R36 "TBD" 0402 33.385,57.924 r0 top
R37 "TBD" 0402 51,52 r270 top
R38 "TBD" 0402 51,49 r270 top
R39 "TBD" 0402 51,46 r270 top
R40 "TBD" 0402 33.385,58.94 r0 top
R41 "TBD" 0402 52,52 r270 top
R42 "10k" 0402 38.481,25.933 r0 bottom
R43 "10k" 0402 50.279,6.99 r0 top
R44 "10k" 0402 38.811,7.341 r180 top
R45 "NC" 0402 47.117,13.462 r180 bottom
R45 "1k" 0402 33.426,26.137 r0 bottom
R46 "FB" 0603 33.147,6.096 r0 top
R47 "FB" 0603 44.602,2.616 r0 top
R48 "10k" 0402 64.516,7.112 r90 top
R49 "10k" 0402 65.786,7.112 r90 top
R50 "10k" 0402 68.326,7.112 r90 top
R51 "TBD" 0402 52,49 r270 top
R52 "TBD" 0402 52,46 r270 top
R53 "TBD" 0402 43.307,58.801 r270 top
R54 "TBD" 0402 50,52 r90 top
R55 "200" 0402 11.694,86.952 r270 bottom
R56 "TBD" 0402 49,49 r90 top
R57 "200" 0402 11.694,88.73 r270 bottom
R58 "TBD" 0402 49,46 r90 top
R59 "TBD" 0402 49,52 r90 top
R60 "10k" 0402 6.5,13.75 r90 top
R61 "1MR" 0402 6.858,5.715 r90 top
R62 "8.06k 1%" 0402 7.5,10.5 r90 top
R63 "200" 0402 23.973,91.086 r90 bottom
R64 "10k" 0402 9.75,10.5 r270 top
R65 "200" 0402 7.884,86.19 r90 bottom
R66 "TBD" 0402 50,49 r90 top
R67 "TBD" 0402 50,46 r90 top
R68 "200" 0402 21.387,89.865 r90 bottom
R69 "200" 0402 21.361,87.706 r270 bottom
R70 "100R" 0402 45.212,53.848 r90 top
R71 "100R" 0402 47.828,51.816 r270 top
R72 "50" 0402 65.01,89.777 r270 bottom
R73 "240" 0402 66.464,87.334 r90 bottom
R74 "200" 0402 28.067,70.104 r90 top
R75 "200" 0402 46.101,69.977 r90 top
R76 "200" 0402 28.067,75.565 r270 top
R77 "200" 0402 46.228,76.2 r270 top
R78 "FB" 0402 45.085,83.312 r270 bottom
R79 "0R" 0402 46.497,82.649 r0 bottom
R80 "FB" 0603 43.409,84.836 r0 top
R81 "10k 1%" 0402 65.274,39.777 r180 top
R82 "FB" 0603 30.328,84.658 r180 top
R83 "NC/FB" 0603 41.58,83.972 r90 top
R84 "50" 0402 11.049,39.675 r180 bottom
R85 "50" 0402 10.719,38.786 r180 bottom
R86 "10k" 0402 14.66,35.839 r0 top
R87 "240" 0402 5.77,37.998 r180 top
R88 "30.1" 0402 16.311,37.49 r90 top
R89 "90.9" 0402 16.311,35.712 r90 top
R90 "5.1k" 0402 6.151,36.093 r0 top
R91 "200" 0402 13.531,71.158 r180 top
R92 "200" 0402 15.088,68.453 r270 top
R93 "200" 0402 12.395,76.251 r0 top
R94 "200" 0402 10.236,67.183 r270 bottom
R95 "200R" 0402 14,92.5 r180 top
R96 "200" 0402 54.356,40.64 r180 top
R97 "200" 0402 54.356,39.624 r180 top
R98 "200" 0402 54.356,38.608 r180 top
R99 "100" 0402 41.148,41.021 r270 top
R100 "200" 0402 40.6,42.5 r180 top
R101 "200" 0402 40.64,39.497 r180 top
R102 "0R" 0402 24.476,44.624 r90 top
R103 "0R" 0402 24.5,38.25 r90 top
R104 "TBD" 0402 16.52,88.222 r180 top
R105 "TBD" 0402 30.337,58.94 r0 top
R106 "NC/0R" 0402 22.606,22.479 r180 bottom
R107 "NC/0R" 0402 28.143,21.895 r0 bottom
R108 "360k" 0402 63.295,23.296 r180 top
R109 "180k" 0402 63.295,22.296 r180 top
R110 "82k" 0402 69.045,22.296 r0 top
R111 "51k" 0402 68.545,24.796 r90 top
R112 "200R" 0402 68.834,93.599 r90 bottom
R113 "200R" 0402 67.945,93.599 r90 bottom
R114 "200R" 0402 67.056,93.599 r90 bottom
R115 "200R" 0402 70.485,90.424 r0 bottom
R116 "200R" 0402 70.485,88.138 r0 bottom
R117 "200R" 0402 70.485,89.027 r0 bottom
R118 "200R" 0402 14.097,34.671 r0 bottom
R119 "200R" 0402 14.097,35.433 r0 bottom
R120 "200R" 0402 14.097,36.195 r0 bottom
R121 "200R" 0402 10.668,33.02 r270 bottom
R122 "200R" 0402 9.144,33.02 r270 bottom
R123 "200R" 0402 8.255,33.02 r270 bottom
R124 "FB" 0603 70.485,41.148 r270 top
R125 "NC/FB" 0603 70.485,44.577 r270 top
R126 "FB" 0603 24.689,47.244 r90 bottom
R127 "FB" 0603 9.525,63.5 r90 bottom
R128 "FB" 0603 17.831,44.602 r270 bottom
R129 "FB" 0603 38.9,47.1 r90 bottom
R130 "FB" 0603 70.18,79.451 r90 bottom
R131 "FB" 0603 26.289,84.023 r90 bottom
T11 "TestPad" TestPad 62.357,42.494 r180 top
T15 "TestPad" TestPad 73.279,38.329 r270 top
U1 "XC6SLX16-2FT256C" FT256 45.085,16.51 r0 top
U2 "SI5351" MSOP10/VSSOP10 32.639,44.704 r0 top
U3 "Tps62410" DFN-10P-3X3 66.106,11.525 r270 top
U4 "NB3N551" SO8 30.988,35.56 r90 top
U5 "TPS62130" TPS62130 64.496,52.723 r180 top
U6 "AD9251_FUNC" AD9251 47.3,37.25 r0 top
U7 "LP5907" SOT23-5 15.081,43.903 r90 top
U8 "M25P16" SO8 51.994,3.658 r180 top
U9 "AD8370" "TSSOP16_44MM_065P - duplicate" 47.252,58.942 r90 top
U10 "MGA81563" SC-70-6 17.282,85.428 r180 top
U11 "SKY13417" SKY13317 23.7,88.8 r180 top
U12 "TC4-1W+" TCM-63AX+ 38.109,58.942 r270 top
U13 "SKY13417" SKY13317 9.408,87.968 r0 top
U14 "MAX2871" MAX2871 66.714,89.834 r270 top
U15 "SKY13320" SKY65404-31 29,72.75 r0 top
U16 "SKY13320" SKY65404-31 45.163,73.053 r180 top
U17 "TCM1-63AX+" TCM-63AX+ 38.623,89.761 r270 top
U18 "ADF4351" ADF4351 10.215,36.855 r180 top
U19 "TCM1-13MX+" TCM-63AX+ 9.199,45.884 r180 top
U20 "USB3320" USB3300 10.25,15 r180 top
U21 "MGA81563" SC-70-6 6.79,72.911 r90 top
U22 "SKY13320" SKY65404-31 12.395,66.675 r90 top
U23 "SKY13320" SKY65404-31 12.007,73.698 r180 top
U24 "STM32F427VGT6" LQFP100_N 25.527,16.002 r90 top
U25 "ADL5801" ADL5801 47.005,89.761 r180 top
U26 "LP5907" SOT23-5 43.815,46.99 r270 top
U27 "LP5907" SOT23-5 28.861,47.724 r270 top
U28 "LP5907" SOT23-5 66.554,81.996 r90 top
U29 "TPS7A8101" TPS7A8101 35.675,85.325 r180 top
U30 "Tps62410" DFN-10P-3X3 66.045,20.546 r270 top
U31 "LP5907" SOT23-5 7.087,65.126 r0 top
U32 "TPS62130" TPS62130 64.881,37.373 r180 top
U33 "LP5907" SOT23-5 43.815,50.419 r270 top
U34 "LP5907" SOT23-5 24.536,84.658 r90 top
USB2 "USB Micro Type B" MICRO-YZX 38.735,-0.127 r0 top
X2 "24mhz" OSCILLATOR-3.2X2.5 9,5.5 r90 top
Y1 "OSC_40M" TXC_7Q 25.238,41.576 r270 top
Y2 "OSC_40M" TXC_7Q 25.23,35.226 r270 top
Y3 "NDF9299" NDF8010 40.337,71.021 r180 top
Y4 "NDF9299" NDF8010 33.75,71 r180 top
Y5 "NDF8010" NDF8010 40.337,74.831 r180 top
Y6 "NDF8010" NDF8010 33.75,74.831 r180 top
Y7 "0868LP15A020" 5515LP15A730/0868LP15A020 15.369,47.242 r180 top

## Footprints (in the part's own frame and the unit in brackets; to place one, negate y for a bottom-side part, rotate by r counter-clockwise, add the part's x,y. Pads: shape width x height; smd on the part's side, far side on the other; paste and mask are expansions set on the pad)
0402 [mil] "0402-RES"
  rect 20x24 smd: 1(-19.69,0) 2(20,0)
0402J [mil] "0402-RES"
  rect 20x20 smd: 1(40,0) 2(0,0) 3(-0.35,-41.34)
0603 [mil] "0603-RES"
  rect 44x40 smd: 1(-33.46,0) 2(34,0)
0805 [mm]
  rect 1x1.27 smd: 1(-1.016,0) 2(1.016,0)
  body extent -1.27,-0.76 1.27,0.76, height 0.8
0806 [mm]
  rect 1x1.65 smd: 1(-1.016,0) 2(1.016,0)
  body extent -1,-0.8 1,0.8, height 0.5
0900BL18B200 [mm]
  rect 0.35x0.8 smd: 1(-1,-0.9) 2(0,-0.9) 3(1,-0.9) 4(1,0.8) 5(0,0.8) 6(-1,0.8)
  silkscreen extent -2.17,-1.17 -1.83,-0.83, body extent -1.6,-0.8 1.6,0.8, height 0.85
5515LP15A730/0868LP15A020 [mm]
  rect 0.35x0.8 smd: 1(-0.65,-0.9) 2(0,-0.9) 3(0.65,-0.9) 5(0.65,0.9) 6(0,0.9) 7(-0.65,0.9)
  rect 0.8x0.35 smd: 4(1.25,0) 8(-1.25,0)
  silkscreen extent -1.43,-1.42 -0.3,0.1, body extent -1,-0.6 1,0.6, height 0.85
AD9251 [mm]
  rect 6.2x6.2 smd: 0(0,0)
  rect 0.8x0.25 smd: 1(-4.5,3.75) 2(-4.5,3.25) 3(-4.5,2.75) 4(-4.5,2.25) 5(-4.5,1.75) 6(-4.5,1.25) 7(-4.5,0.75) 8(-4.5,0.25) 9(-4.5,-0.25) 10(-4.5,-0.75) 11(-4.5,-1.25) 12(-4.5,-1.75) 13(-4.5,-2.25) 14(-4.5,-2.75) 15(-4.5,-3.25) 16(-4.5,-3.75) 33(4.5,-3.75) 34(4.5,-3.25) 35(4.5,-2.75) 36(4.5,-2.25) 37(4.5,-1.75) 38(4.5,-1.25) 39(4.5,-0.75) 40(4.5,-0.25) 41(4.5,0.25) 42(4.5,0.75) 43(4.5,1.25) 44(4.5,1.75) 45(4.5,2.25) 46(4.5,2.75) 47(4.5,3.25) 48(4.5,3.75)
  rect 0.25x0.8 smd: 17(-3.75,-4.5) 18(-3.25,-4.5) 19(-2.75,-4.5) 20(-2.25,-4.5) 21(-1.75,-4.5) 22(-1.25,-4.5) 23(-0.75,-4.5) 24(-0.25,-4.5) 25(0.25,-4.5) 26(0.75,-4.5) 27(1.25,-4.5) 28(1.75,-4.5) 29(2.25,-4.5) 30(2.75,-4.5) 31(3.25,-4.5) 32(3.75,-4.5) 49(3.75,4.5) 50(3.25,4.5) 51(2.75,4.5) 52(2.25,4.5) 53(1.75,4.5) 54(1.25,4.5) 55(0.75,4.5) 56(0.25,4.5) 57(-0.25,4.5) 58(-0.75,4.5) 59(-1.25,4.5) 60(-1.75,4.5) 61(-2.25,4.5) 62(-2.75,4.5) 63(-3.25,4.5) 64(-3.75,4.5)
  silkscreen extent -5.25,-4.75 4.75,5.25, body extent -4.5,-4.5 4.5,4.5, height 0.85
ADE-2 [mm]
  rect 2.54x1.65 smd: 1(-3,2.54) 2(-3,0) 3(-3,-2.54) 4(3,-2.54) 5(3,0) 6(3,2.54)
  silkscreen extent -2.9,4.3 -2.5,4.7, body extent -3.6,-4 3.6,4, height 2.85
ADF4351 [mm]
  rect 3.15x3.15 smd: 0(0,0)
  rect 0.75x0.25 smd: 1(-2.5,1.75) 2(-2.5,1.25) 3(-2.5,0.75) 4(-2.5,0.25) 5(-2.5,-0.25) 6(-2.5,-0.75) 7(-2.5,-1.25) 8(-2.5,-1.75) 17(2.5,-1.75) 18(2.5,-1.25) 19(2.5,-0.75) 20(2.5,-0.25) 21(2.5,0.25) 22(2.5,0.75) 23(2.5,1.25) 24(2.5,1.75)
  rect 0.25x0.75 smd: 9(-1.75,-2.5) 10(-1.25,-2.5) 11(-0.75,-2.5) 12(-0.25,-2.5) 13(0.25,-2.5) 14(0.75,-2.5) 15(1.25,-2.5) 16(1.75,-2.5) 25(1.75,2.5) 26(1.25,2.5) 27(0.75,2.5) 28(0.25,2.5) 29(-0.25,2.5) 30(-0.75,2.5) 31(-1.25,2.5) 32(-1.75,2.5)
  silkscreen extent -2.9,-2.5 2.5,2.8, body extent -2.5,-2.5 2.5,2.5, height 0.7
ADL5801 [mm]
  rect 2.5x2.5 smd: 0(0,0)
  rect 0.75x0.25 smd: 1(-2,1.25) 2(-2,0.75) 3(-2,0.25) 4(-2,-0.25) 5(-2,-0.75) 6(-2,-1.25) 13(2,-1.25) 14(2,-0.75) 15(2,-0.25) 16(2,0.25) 17(2,0.75) 18(2,1.25)
  rect 0.25x0.75 smd: 7(-1.25,-2) 8(-0.75,-2) 9(-0.25,-2) 10(0.25,-2) 11(0.75,-2) 12(1.25,-2) 19(1.25,2) 20(0.75,2) 21(0.25,2) 22(-0.25,2) 23(-0.75,2) 24(-1.25,2)
  silkscreen extent -2.2,-2.2 2.2,2.2, body extent -2,-2 2,2, height 0.85
DFN-10P-3X3 [mm]
  rect 0.75x0.25 smd mask+0.064: 1(-1.451,0.999) 2(-1.451,0.499) 3(-1.451,-0.001) 4(-1.451,-0.501) 5(-1.451,-1.001) 6(1.4,-1.001) 7(1.4,-0.501) 8(1.4,-0.001) 9(1.4,0.499) 10(1.4,0.999)
  rect 1.64x2.6 smd: 11(-0.025,-0.001)
  silkscreen extent -1.96,-1.63 1.9,1.95
FT256 [mm] "BGA, 256-Leads, Body 17x17mm, Pitch 1mm"
  round 0.45 smd: A1(-7.5,7.5) A2(-6.5,7.5) A3(-5.5,7.5) A4(-4.5,7.5) A5(-3.5,7.5) A6(-2.5,7.5) A7(-1.5,7.5) A8(-0.5,7.5) A9(0.5,7.5) A10(1.5,7.5) A11(2.5,7.5) A12(3.5,7.5) A13(4.5,7.5) A14(5.5,7.5) A15(6.5,7.5) A16(7.5,7.5) B1(-7.5,6.5) B2(-6.5,6.5) B3(-5.5,6.5) B4(-4.5,6.5) B5(-3.5,6.5) B6(-2.5,6.5) B7(-1.5,6.5) B8(-0.5,6.5) B9(0.5,6.5) B10(1.5,6.5) B11(2.5,6.5) B12(3.5,6.5) B13(4.5,6.5) B14(5.5,6.5) B15(6.5,6.5) B16(7.5,6.5) C1(-7.5,5.5) C2(-6.5,5.5) C3(-5.5,5.5) C4(-4.5,5.5) C5(-3.5,5.5) C6(-2.5,5.5) C7(-1.5,5.5) C8(-0.5,5.5) C9(0.5,5.5) C10(1.5,5.5) C11(2.5,5.5) C12(3.5,5.5) C13(4.5,5.5) C14(5.5,5.5) C15(6.5,5.5) C16(7.5,5.5) D1(-7.5,4.5) D2(-6.5,4.5) D3(-5.5,4.5) D4(-4.5,4.5) D5(-3.5,4.5) D6(-2.5,4.5) D7(-1.5,4.5) D8(-0.5,4.5) D9(0.5,4.5) D10(1.5,4.5) D11(2.5,4.5) D12(3.5,4.5) D13(4.5,4.5) D14(5.5,4.5) D15(6.5,4.5) D16(7.5,4.5) E1(-7.5,3.5) E2(-6.5,3.5) E3(-5.5,3.5) E4(-4.5,3.5) E5(-3.5,3.5) E6(-2.5,3.5) E7(-1.5,3.5) E8(-0.5,3.5) E9(0.5,3.5) E10(1.5,3.5) E11(2.5,3.5) E12(3.5,3.5) E13(4.5,3.5) E14(5.5,3.5) E15(6.5,3.5) E16(7.5,3.5) F1(-7.5,2.5) F2(-6.5,2.5) F3(-5.5,2.5) F4(-4.5,2.5) F5(-3.5,2.5) F6(-2.5,2.5) F7(-1.5,2.5) F8(-0.5,2.5) F9(0.5,2.5) F10(1.5,2.5) F11(2.5,2.5) F12(3.5,2.5) F13(4.5,2.5) F14(5.5,2.5) F15(6.5,2.5) F16(7.5,2.5) G1(-7.5,1.5) G2(-6.5,1.5) G3(-5.5,1.5) G4(-4.5,1.5) G5(-3.5,1.5) G6(-2.5,1.5) G7(-1.5,1.5) G8(-0.5,1.5) G9(0.5,1.5) G10(1.5,1.5) G11(2.5,1.5) G12(3.5,1.5) G13(4.5,1.5) G14(5.5,1.5) G15(6.5,1.5) G16(7.5,1.5) H1(-7.5,0.5) H2(-6.5,0.5) H3(-5.5,0.5) H4(-4.5,0.5) H5(-3.5,0.5) H6(-2.5,0.5) H7(-1.5,0.5) H8(-0.5,0.5) H9(0.5,0.5) H10(1.5,0.5) H11(2.5,0.5) H12(3.5,0.5) H13(4.5,0.5) H14(5.5,0.5) H15(6.5,0.5) H16(7.5,0.5) J1(-7.5,-0.5) J2(-6.5,-0.5) J3(-5.5,-0.5) J4(-4.5,-0.5) J5(-3.5,-0.5) J6(-2.5,-0.5) J7(-1.5,-0.5) J8(-0.5,-0.5) J9(0.5,-0.5) J10(1.5,-0.5) J11(2.5,-0.5) J12(3.5,-0.5) J13(4.5,-0.5) J14(5.5,-0.5) J15(6.5,-0.5) J16(7.5,-0.5) K1(-7.5,-1.5) K2(-6.5,-1.5) K3(-5.5,-1.5) K4(-4.5,-1.5) K5(-3.5,-1.5) K6(-2.5,-1.5) K7(-1.5,-1.5) K8(-0.5,-1.5) K9(0.5,-1.5) K10(1.5,-1.5) K11(2.5,-1.5) K12(3.5,-1.5) K13(4.5,-1.5) K14(5.5,-1.5) K15(6.5,-1.5) K16(7.5,-1.5) L1(-7.5,-2.5) L2(-6.5,-2.5) L3(-5.5,-2.5) L4(-4.5,-2.5) L5(-3.5,-2.5) L6(-2.5,-2.5) L7(-1.5,-2.5) L8(-0.5,-2.5) L9(0.5,-2.5) L10(1.5,-2.5) L11(2.5,-2.5) L12(3.5,-2.5) L13(4.5,-2.5) L14(5.5,-2.5) L15(6.5,-2.5) L16(7.5,-2.5) M1(-7.5,-3.5) M2(-6.5,-3.5) M3(-5.5,-3.5) M4(-4.5,-3.5) M5(-3.5,-3.5) M6(-2.5,-3.5) M7(-1.5,-3.5) M8(-0.5,-3.5) M9(0.5,-3.5) M10(1.5,-3.5) M11(2.5,-3.5) M12(3.5,-3.5) M13(4.5,-3.5) M14(5.5,-3.5) M15(6.5,-3.5) M16(7.5,-3.5) N1(-7.5,-4.5) N2(-6.5,-4.5) N3(-5.5,-4.5) N4(-4.5,-4.5) N5(-3.5,-4.5) N6(-2.5,-4.5) N7(-1.5,-4.5) N8(-0.5,-4.5) N9(0.5,-4.5) N10(1.5,-4.5) N11(2.5,-4.5) N12(3.5,-4.5) N13(4.5,-4.5) N14(5.5,-4.5) N15(6.5,-4.5) N16(7.5,-4.5) P1(-7.5,-5.5) P2(-6.5,-5.5) P3(-5.5,-5.5) P4(-4.5,-5.5) P5(-3.5,-5.5) P6(-2.5,-5.5) P7(-1.5,-5.5) P8(-0.5,-5.5) P9(0.5,-5.5) P10(1.5,-5.5) P11(2.5,-5.5) P12(3.5,-5.5) P13(4.5,-5.5) P14(5.5,-5.5) P15(6.5,-5.5) P16(7.5,-5.5) R1(-7.5,-6.5) R2(-6.5,-6.5) R3(-5.5,-6.5) R4(-4.5,-6.5) R5(-3.5,-6.5) R6(-2.5,-6.5) R7(-1.5,-6.5) R8(-0.5,-6.5) R9(0.5,-6.5) R10(1.5,-6.5) R11(2.5,-6.5) R12(3.5,-6.5) R13(4.5,-6.5) R14(5.5,-6.5) R15(6.5,-6.5) R16(7.5,-6.5) T1(-7.5,-7.5) T2(-6.5,-7.5) T3(-5.5,-7.5) T4(-4.5,-7.5) T5(-3.5,-7.5) T6(-2.5,-7.5) T7(-1.5,-7.5) T8(-0.5,-7.5) T9(0.5,-7.5) T10(1.5,-7.5) T11(2.5,-7.5) T12(3.5,-7.5) T13(4.5,-7.5) T14(5.5,-7.5) T15(6.5,-7.5) T16(7.5,-7.5)
  silkscreen extent -9.27,-8.5 8.5,8.5, body extent -8.5,-8.5 8.5,8.5, height 1.55
GH1.25-6 [mm]
  rect 1x2.8 smd: 0(-5.1,-1.5) 0(4.9,-1.5)
  rect 0.6x1.8 smd: 1(-3.125,1.45) 2(-1.875,1.45) 3(-0.625,1.45) 4(0.625,1.45) 5(1.875,1.45) 6(3.125,1.45)
  body extent -5.48,-3.1 5.27,1.75, height 4.25
L4015 [mm]
  rect 1x3.7 smd: 1(0,0) 2(3,0)
LQFP100_N [mm]
  oval 1.8x0.3 smd: 1(-7.55,6) 2(-7.55,5.5) 3(-7.55,5) 4(-7.55,4.5) 5(-7.55,4) 6(-7.55,3.5) 7(-7.55,3) 8(-7.55,2.5) 9(-7.55,2) 10(-7.55,1.5) 11(-7.55,1) 12(-7.55,0.5) 13(-7.55,0) 14(-7.55,-0.5) 15(-7.55,-1) 16(-7.55,-1.5) 17(-7.55,-2) 18(-7.55,-2.5) 19(-7.55,-3) 20(-7.55,-3.5) 21(-7.55,-4) 22(-7.55,-4.5) 23(-7.55,-5) 24(-7.55,-5.5) 25(-7.55,-6) 51(7.55,-6) 52(7.55,-5.5) 53(7.55,-5) 54(7.55,-4.5) 55(7.55,-4) 56(7.55,-3.5) 57(7.55,-3) 58(7.55,-2.5) 59(7.55,-2) 60(7.55,-1.5) 61(7.55,-1) 62(7.55,-0.5) 63(7.55,0) 64(7.55,0.5) 65(7.55,1) 66(7.55,1.5) 67(7.55,2) 68(7.55,2.5) 69(7.55,3) 70(7.55,3.5) 71(7.55,4) 72(7.55,4.5) 73(7.55,5) 74(7.55,5.5) 75(7.55,6)
  oval 0.3x1.8 smd: 26(-6,-7.55) 27(-5.5,-7.55) 28(-5,-7.55) 29(-4.5,-7.55) 30(-4,-7.55) 31(-3.5,-7.55) 32(-3,-7.55) 33(-2.5,-7.55) 34(-2,-7.55) 35(-1.5,-7.55) 36(-1,-7.55) 37(-0.5,-7.55) 38(0,-7.55) 39(0.5,-7.55) 40(1,-7.55) 41(1.5,-7.55) 42(2,-7.55) 43(2.5,-7.55) 44(3,-7.55) 45(3.5,-7.55) 46(4,-7.55) 47(4.5,-7.55) 48(5,-7.55) 49(5.5,-7.55) 50(6,-7.55) 76(6,7.55) 77(5.5,7.55) 78(5,7.55) 79(4.5,7.55) 80(4,7.55) 81(3.5,7.55) 82(3,7.55) 83(2.5,7.55) 84(2,7.55) 85(1.5,7.55) 86(1,7.55) 87(0.5,7.55) 88(0,7.55) 89(-0.5,7.55) 90(-1,7.55) 91(-1.5,7.55) 92(-2,7.55) 93(-2.5,7.55) 94(-3,7.55) 95(-3.5,7.55) 96(-4,7.55) 97(-4.5,7.55) 98(-5,7.55) 99(-5.5,7.55) 100(-6,7.55)
  silkscreen extent -7.67,-6.25 6.25,6.82
MAX2871 [mm]
  rect 3.15x3.15 smd: 0(0,0)
  rect 0.75x0.25 smd: 1(-2.5,1.75) 2(-2.5,1.25) 3(-2.5,0.75) 4(-2.5,0.25) 5(-2.5,-0.25) 6(-2.5,-0.75) 7(-2.5,-1.25) 8(-2.5,-1.75) 17(2.5,-1.75) 18(2.5,-1.25) 19(2.5,-0.75) 20(2.5,-0.25) 21(2.5,0.25) 22(2.5,0.75) 23(2.5,1.25) 24(2.5,1.75)
  rect 0.25x0.75 smd: 9(-1.75,-2.5) 10(-1.25,-2.5) 11(-0.75,-2.5) 12(-0.25,-2.5) 13(0.25,-2.5) 14(0.75,-2.5) 15(1.25,-2.5) 16(1.75,-2.5) 25(1.75,2.5) 26(1.25,2.5) 27(0.75,2.5) 28(0.25,2.5) 29(-0.25,2.5) 30(-0.75,2.5) 31(-1.25,2.5) 32(-1.75,2.5)
  silkscreen extent -2.9,-2.5 2.5,2.8, body extent -2.5,-2.5 2.5,2.5, height 0.7
MICRO-YZX [mm]
  rect 0.4x1.5 smd: 1(-1.3,5.85) 5(1.3,5.85)
  rect 0.3x1.5 smd: 2(-0.65,5.85) 3(0,5.85) 4(0.65,5.85)
  oval 1x1.7 hole 0.8 slot 1.2 at 90 deg: 5(-3.625,2.82) 5(3.625,2.82)
  oval 1.1x1.2 hole 0.7: 5(-2.425,5.5) 5(2.425,5.5)
  rect 4x2 smd: 5(0,2.95)
  silkscreen extent -3.4,4.05 3.4,5.25, body extent -4.02,0.33 3.98,5.93, height 2.6
MSOP10/VSSOP10 [mm]
  rect 1.45x0.45 smd: 1(-4.4,0) 2(-4.4,-0.65) 3(-4.4,-1.3) 4(-4.4,-1.95) 5(-4.4,-2.6) 6(0,-2.6) 7(0,-1.95) 8(0,-1.3) 9(0,-0.65) 10(0,0)
  silkscreen extent -3.1,-0.12 -2.85,0.08
NDF8010 [mm]
  rect 1.2x0.6 smd: 1(-1.5,1) 2(-1.5,0) 3(-1.5,-1) 4(1.5,-1) 5(1.5,0) 6(1.5,1)
  silkscreen extent -1.7,1.8 -1.3,2.2, body extent -1.5,-1.5 1.5,1.5, height 1.3
OSCILLATOR-3.2X2.5 [mil] "OSCILLATOR-3.2X2.5"
  rect 56x48 smd: 1(-43.31,-33.46) 2(44,-33.46) 3(44,34) 4(-43.31,34)
  silkscreen extent -95,-83 83,71
SC-70-6 [mm]
  rect 1x0.42 smd mask+0.051: 1(0.97,-0.65) 2(0.97,0) 3(0.97,0.65) 4(-0.97,0.65) 5(-0.975,0) 6(-0.97,-0.65)
  silkscreen extent 0.2,-0.8 0.4,-0.53
SKY13317 [mm]
  rect 0.7x1.2 smd: 0(0,0)
  rect 0.4x0.2 smd: 1(-0.87,0.6) 2(-0.87,0.2) 3(-0.87,-0.2) 4(-0.87,-0.6) 5(0.87,-0.6) 6(0.87,-0.2) 7(0.87,0.2) 8(0.87,0.6)
  silkscreen extent -2,1 -1.8,1, body extent -0.75,-0.75 0.75,0.75, height 0.45
SKY65404-31 [mm]
  rect 0.7x1.2 smd: 0(0,0)
  rect 0.65x0.35 smd: 1(-0.87,0.5) 2(-0.87,0) 3(-0.87,-0.5) 4(0.87,-0.5) 5(0.87,0) 6(0.87,0.5)
  silkscreen extent -2,1 -1.8,1, body extent -0.75,-0.75 0.75,0.75, height 0.45
SMA-2 [mm]
  rect 0.75x1.5 smd: 1(2.5,1.2)
  rect 2x4 smd: GND(0,0) GND(5,0)
  Top Layer pour cut-out: 1,2 4,2 4,-2 1,-2
SMA-SMT [mm]
  round 1.5 smd: 1(0,0)
  rect 2x2 smd: GND(-2.37,-2.37) GND(-2.37,2.37) GND(2.37,-2.37) GND(2.37,2.37)
SO8 [mm]
  rect 1x0.559 smd: 1(-3,1.905) 2(-3,0.635) 3(-3,-0.635) 4(-3,-1.905) 5(3,-1.905) 6(3,-0.635) 7(3,0.635) 8(3,1.905)
  silkscreen extent -1.37,-2.5 1.37,2.5, body extent -3,-2.45 3,2.45, height 1.63
SOT23-5 [mil] "SOT23-5"
  rect 22x48 smd: 1(-37.4,-51.19) 2(0,-51.19) 3(38,-51.19) 4(38,52) 5(-37.4,52)
  silkscreen extent -56,-17 56,32
TCM-63AX+ [mm]
  rect 0.75x1.65 smd: 1(-1.27,1.6) 2(0,1.6) 3(1.27,1.6) 4(1.27,-1.6) 5(-1.27,-1.6)
  silkscreen extent -1.9,-1.9 1.9,1.9
TestPad [mil]
  round 60 hole 30: 1(0,0)
TPS7A8101 [mm]
  rect 1.5x2.8 smd: 0(0,0)
  rect 0.6x0.3 smd: 1(-1.5,0.975) 2(-1.5,0.325) 3(-1.5,-0.325) 4(-1.5,-0.975) 5(1.5,-0.975) 6(1.5,-0.325) 7(1.5,0.325) 8(1.5,0.975)
  silkscreen extent -1.6,-1.6 1.6,1.6, body extent -1.5,-1.5 1.5,1.5, height 0.6
TPS62130 [mm]
  rect 1.7x1.7 smd: 0(0,0)
  rect 0.6x0.25 smd: 1(-1.5,0.75) 2(-1.5,0.25) 3(-1.5,-0.25) 4(-1.5,-0.75) 9(1.5,-0.75) 10(1.5,-0.25) 11(1.5,0.25) 12(1.5,0.75)
  rect 0.25x0.6 smd: 5(-0.75,-1.5) 6(-0.25,-1.5) 7(0.25,-1.5) 8(0.75,-1.5) 13(0.75,1.5) 14(0.25,1.5) 15(-0.25,1.5) 16(-0.75,1.5)
  silkscreen extent -1.5,-1.5 1.5,1.5, body extent -1.5,-1.5 1.5,1.5, height 0.6
"TSSOP16_44MM_065P - duplicate" [mm]
  oval 1.5x0.45 smd: 1(-2.95,2.275) 2(-2.95,1.625) 3(-2.95,0.975) 4(-2.95,0.325) 5(-2.95,-0.325) 6(-2.95,-0.975) 7(-2.95,-1.625) 8(-2.95,-2.275) 9(2.95,-2.275) 10(2.95,-1.625) 11(2.95,-0.975) 12(2.95,-0.325) 13(2.95,0.325) 14(2.95,0.975) 15(2.95,1.625) 16(2.95,2.275)
  silkscreen extent -1.87,-2.47 1.88,2.53
TXC_7Q [mm]
  rect 1x0.9 smd: 1(-1.275,-0.9) 2(1.275,-0.9) 3(1.275,0.9) 4(-1.275,0.9)
  silkscreen extent -2.53,-1.6 1.77,1.35
USB3300 [mm]
  round 0.75 hole 0.4: 0(-1,1) 0(-1,-1) 0(1,1) 0(1,-1)
  rect 0.8x0.25 smd: 1(-2.6,1.75) 2(-2.6,1.25) 3(-2.6,0.75) 4(-2.6,0.25) 5(-2.6,-0.25) 6(-2.6,-0.75) 7(-2.6,-1.25) 8(-2.6,-1.75) 17(2.6,-1.75) 18(2.6,-1.25) 19(2.6,-0.75) 20(2.6,-0.25) 21(2.6,0.25) 22(2.6,0.75) 23(2.6,1.25) 24(2.6,1.75)
  rect 0.25x0.8 smd: 9(-1.75,-2.6) 10(-1.25,-2.6) 11(-0.75,-2.6) 12(-0.25,-2.6) 13(0.25,-2.6) 14(0.75,-2.6) 15(1.25,-2.6) 16(1.75,-2.6) 25(1.75,2.6) 26(1.25,2.6) 27(0.75,2.6) 28(0.25,2.6) 29(-0.25,2.6) 30(-0.75,2.6) 31(-1.25,2.6) 32(-1.75,2.6)
  silkscreen extent -2.5,-2.5 2.5,2.5, body extent -2.5,-2.5 2.5,2.5, height 0.85

## Part data
C1 C4 C5 C6 C8 C9 C10 C11 C12 C23 C24 C25 C26 C27 C28 C29 C30 C34 C39 C40 C41 C42 C47 C48 C49 C50 C51 C52 C57 C58 C60 C62 C63 C64 C65 C68 C69 C73 C74 C75 C76 C79 C80 C81 C82 C83 C84 C85 C86 C87 C89 C90 C91 C92 C93 C94 C95 C96 C97 C98 C99 C100 C101 C102 C103 C105 C108 C109 C110 C111 C112 C113 C114 C116 C117 C118 C119 C120 C121 C122 C123 C124 C125 C127 C128 C129 C130 C131 C132 C133 C134 C135 C136 C137 C138 C139 C140 C141 C142 C143 C144 C145 C146 C147 C148 C149 C150 C151 C152 C153 C170 C171 C172 C173 C174 C175 C184 C185 C186 C194 C204 C205 C206 C207 C208 C209 C210 C211 C212 C213 C214 C215 C218 C219 C222: library part CAP0402-CAP, "<b>Capacitor</b> / Standard 0603 ceramic capacitor, and 0.1\" leaded capacitor."
C2 C13 C14 C17 C18 C19 C20 C21 C22 C43 C44 C45 C46 C59 C61 C66 C67 C70 C71 C72 C77 C78 C88 C104 C106 C107 C115 C126 C156 C157 C160 C161 C162 C163 C166 C168 C176 C177 C178 C179 C180 C181 C183 C192 C193 C195 C196 C201 C202 C203 C220 C221: library part Cap, "Capacitor"
C3 C15 C16 C31 C32 C33 C35 C36 C37 C38 C154 C155 C158 C159 C164 C165 C167 C169 C182 C197 C198 C199 C200 C216 C217: "Capacitor"
C7 C53 C54 C55 C56 C187 C188 C189 C190 C191: library part CAP/0402
FB1 FB2 FB3 FB4 FB5 FB6 FB7 FB8 R2 R3 R4 R5 R6 R7 R8 R9 R13 R15 R16 R17 R18 R19 R20 R21 R22 R23 R24 R25 R26 R27 R28 R29 R30 R31 R32 R33 R34 R35 R36 R37 R38 R39 R40 R41 R42 R43 R44 R45 R45 R46 R47 R48 R49 R50 R51 R52 R53 R54 R55 R56 R57 R58 R59 R60 R61 R62 R63 R64 R65 R66 R67 R68 R69 R70 R71 R72 R73 R74 R75 R76 R77 R78 R79 R80 R81 R82 R83 R84 R85 R86 R87 R88 R89 R90 R91 R92 R93 R94 R95 R96 R97 R98 R99 R100 R101 R102 R103 R104 R105 R106 R107 R112 R113 R114 R115 R116 R117 R118 R119 R120 R121 R122 R123 R124 R125 R126 R127 R128 R129 R130 R131: library part Res2, "Resistor"
J1 J2 J3: library part SW-SPDT, "SPDT Subminiature Toggle Switch, Right Angle Mounting, Vertical Actuation"
L9 L10 L17 L18: library part L/2.5*2.0
L11 L12: library part Inductor, "Inductor"
LED1 LED2 LED3: "Typical INFRARED GaAs LED"
LNA1 LNA2: library part SKY65404-31
P2: "Connector SMD USB Micro Type B middle mount"
R1 R11 R12 R14 R108 R109 R110 R111: library part RES/0402_3
R10: "Resistor"
U1: "Spartan-6 LX 1.2V FPGA, 186 User I/Os, 256-Ball Fine-Pitch Thin BGA (1.0mm Pitch), Speed Grade 2, Commercial Grade"
U12 U17 U19: library part TCM-63AX+
U24: library part STM32F103VBT6, "STM32 ARM-based 32-bit MCU with 64 Kbytes Flash, 100-pin LQFP, Industrial Temperature"
USB2: library part USB_Micro_TypeB, "Connector SMD USB Micro Type B middle mount"
X2: library part OSCILLATOR-3.2X2.5, "Crystal Oscillator in 3.2x2.5 SMD"
Y3 Y4: library part NDF8010
Y7: library part 5515LP15A730/0868LP15A020

## Free pads (board coordinates)
  round 4 hole 2.5: 1(2.3,2.3) 1(2.3,28.9) 1(2.3,51.7) 1(2.3,79.8) 1(2.3,97.8) 1(17.754,79.8) 1(20.5,29) 1(20.5,51.7) 1(36.8,28.9) 1(57.7,66.3) 1(57.7,97.8) 1(74.8,2.3) 1(74.8,28.9) 1(74.8,61.4) 1(74.8,97.8)

## Via types
v1: diameter 0.508, hole 0.305, Top Layer to Bottom Layer, 1419 vias
v2: diameter 0.508, hole 0.305, Top Layer to Bottom Layer, tented both sides, 723 vias
v3: diameter 0.5, hole 0.3, Top Layer to Bottom Layer, tented both sides, 254 vias
v4: diameter 1.27, hole 0.762, Top Layer to Bottom Layer, tented both sides, 6 vias
v5: diameter 1.27, hole 0.711, Top Layer to Bottom Layer, tented both sides, 1 vias

## Nets (pads, with @x,y where several pads share a name; then routed paths per layer and width w, separated by ;. In a path a pad name is that pad's centre, name@x,y a point inside that pad or via, vN(x,y) a via of type N, cw(c..) or ccw(c..) an arc to the next point about the centre after c; other vN are vias at no path point)
1.2: C19.1 C20.1 C189.2 L9.2 R106.1 R107.1 R108.2 U1.G7 U1.G9 U1.H8 U1.H10 U1.J7 U1.J9 U1.K8 U1.K10 U30.4 | length 61.7
  Top Layer w0.152: v3(28.346,19.888) 29.388,19.888 29.972,19.304 v3(29.972,15.621) ; v2(43.085,15.51) U1.J7@43.585,16.01 ; v2(43.085,18.51) U1.G7@43.585,18.01 ; v2(44.085,14.51) U1.K8@44.585,15.01 ; v2(44.085,17.51) U1.H8@44.585,17.01 ; U1.J9@45.585,16.01 v2(46.085,15.51) ; U1.G9@45.585,18.01 v2(46.085,18.51) ; U1.K10@46.585,15.01 v2(47.085,14.51) ; U1.H10@46.585,17.01 v2(47.085,17.51)
  Top Layer w0.254: L9.2@61.529,18.796 C189.2@61.529,20.796 61.529,22.038 R108.2@62.787,23.296 62.841,23.296 63.425,23.88 64.258,23.88 64.516,23.622 64.516,22.987 64.852,22.651 65.36,22.651 65.544,22.467 U30.4@65.544,21.997
  Top Layer w1.016: v5(60.935,15.672) 61.529,16.266 L9.2@61.529,18.796
  Signal Layer 1 w0.152: v3(27.483,22.098) 27.483,22.022 27.508,22.047 27.965,22.047 28.346,21.666 v3(28.346,19.888)
  Bottom Layer w0.152: R106.1@23.106,22.479 24.097,21.488 27.237,21.488 R107.1@27.643,21.895 ; v3(29.972,15.621) 30.48,16.129 42.466,16.129 v2(43.085,15.51)
  Bottom Layer w1.016: C19.1@45.585,15.51 46.585,16.51 60.096,16.51 v5(60.935,15.672)